# Altium PCB 175-00060, rev2, PCB, NRES RTD_TEC Board.PcbDoc (part 1 of 4)
Units mm, origin at the board's own origin, x right, y up, seen from the top; angles counter-clockwise.
Board outline 188.3 x 85 mm, 8 copper layers (Top Layer (*.GTL), MidLayer1 (*.G1), InternalPlane1 (*.GP1), InternalPlane2 (*.GP2), InternalPlane3 (*.GP3), InternalPlane4 (*.GP4), MidLayer2 (*.G2), Bottom Layer (*.GBL)), stack 1.748 mm thick; 256 components, 199 nets, 1067 pads, 575 vias.
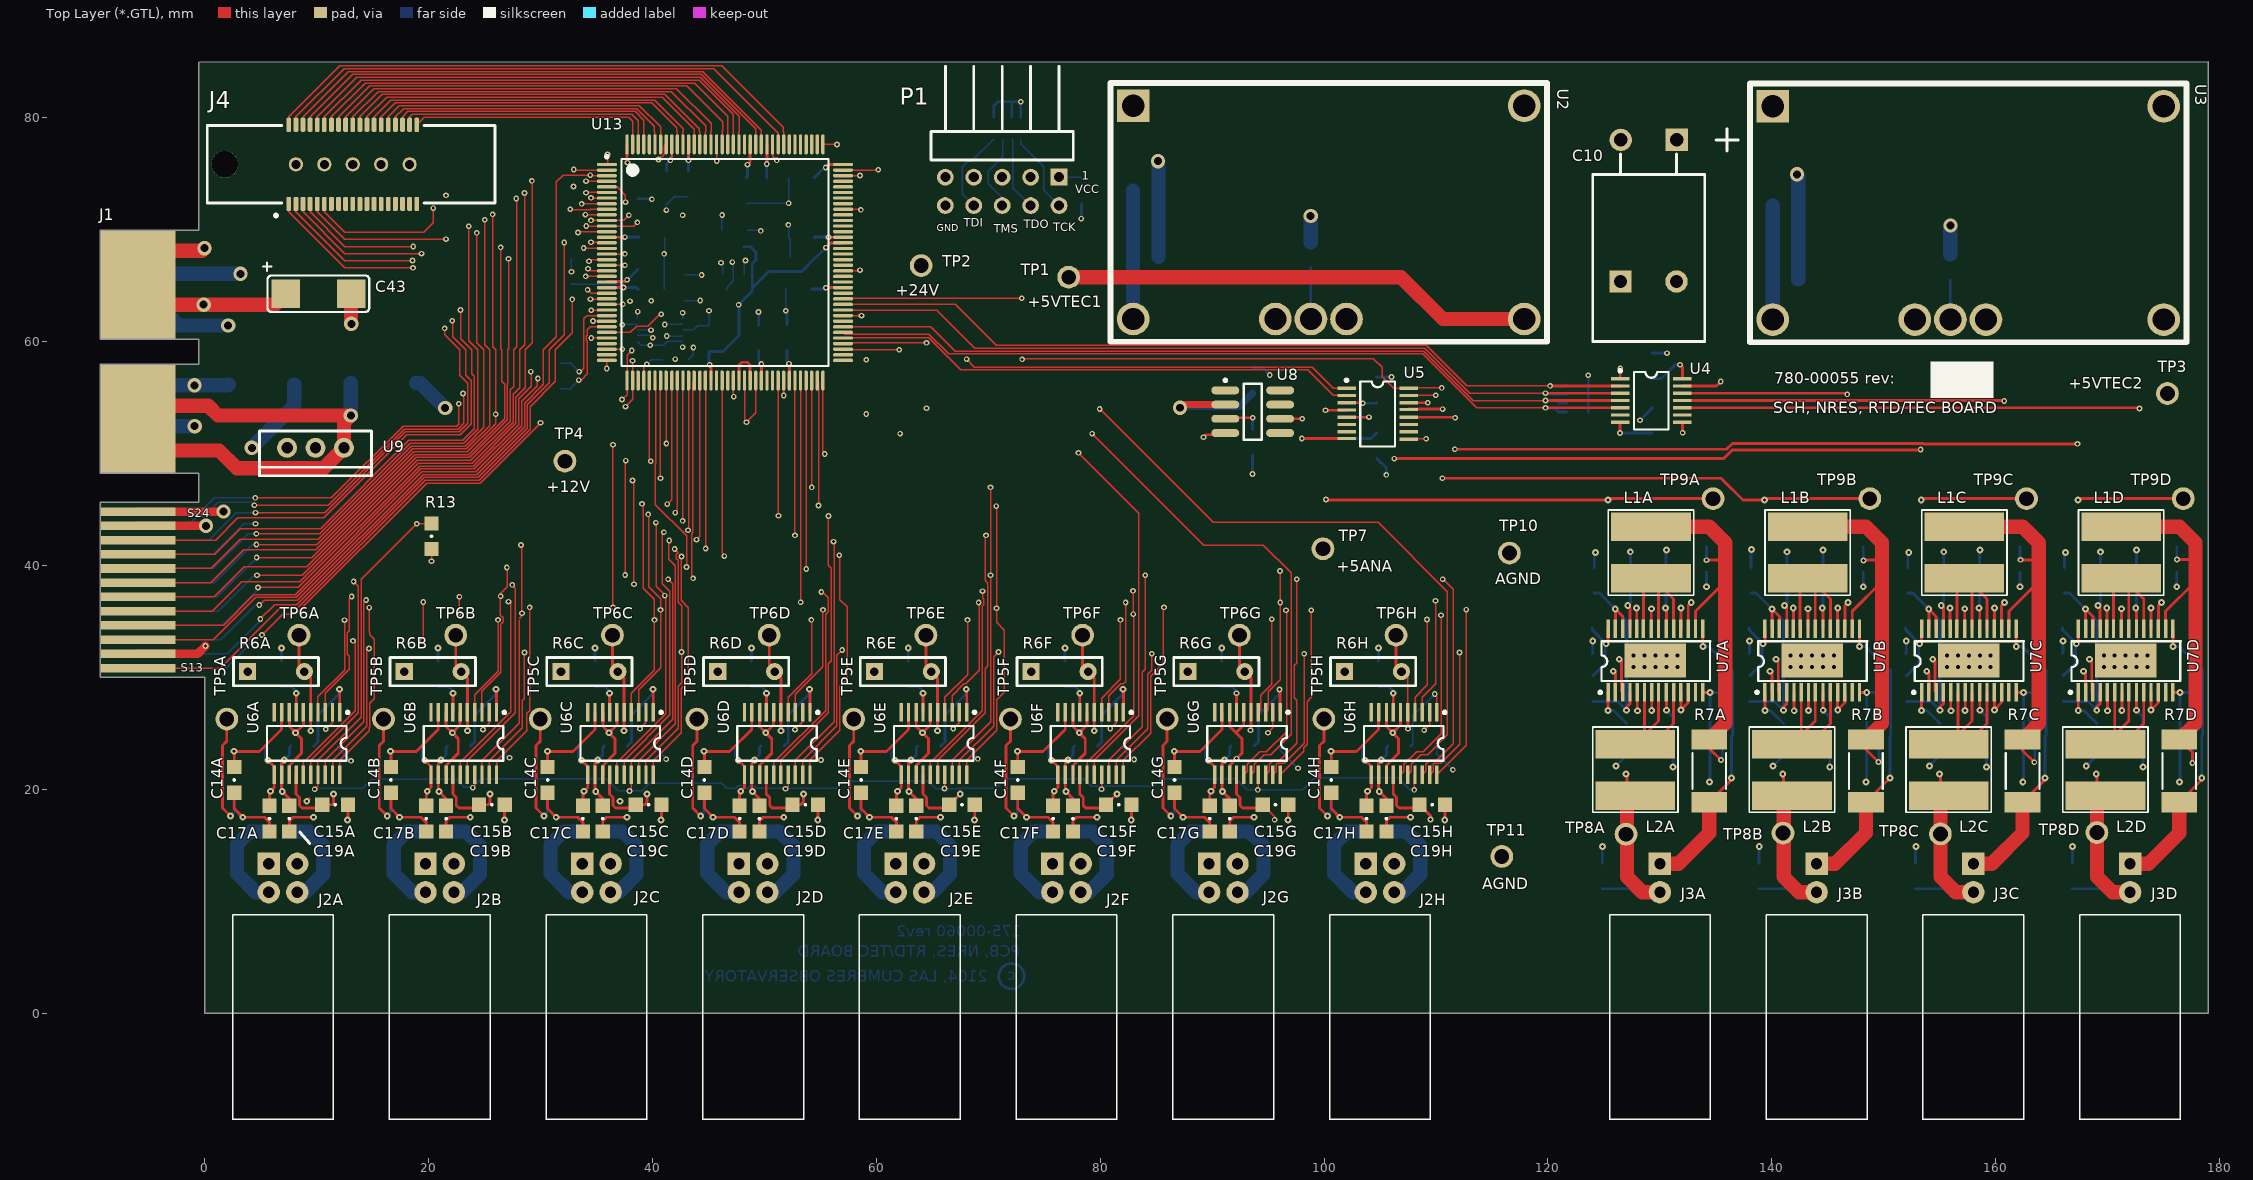
[diagram p0: Top Layer (*.GTL) view]
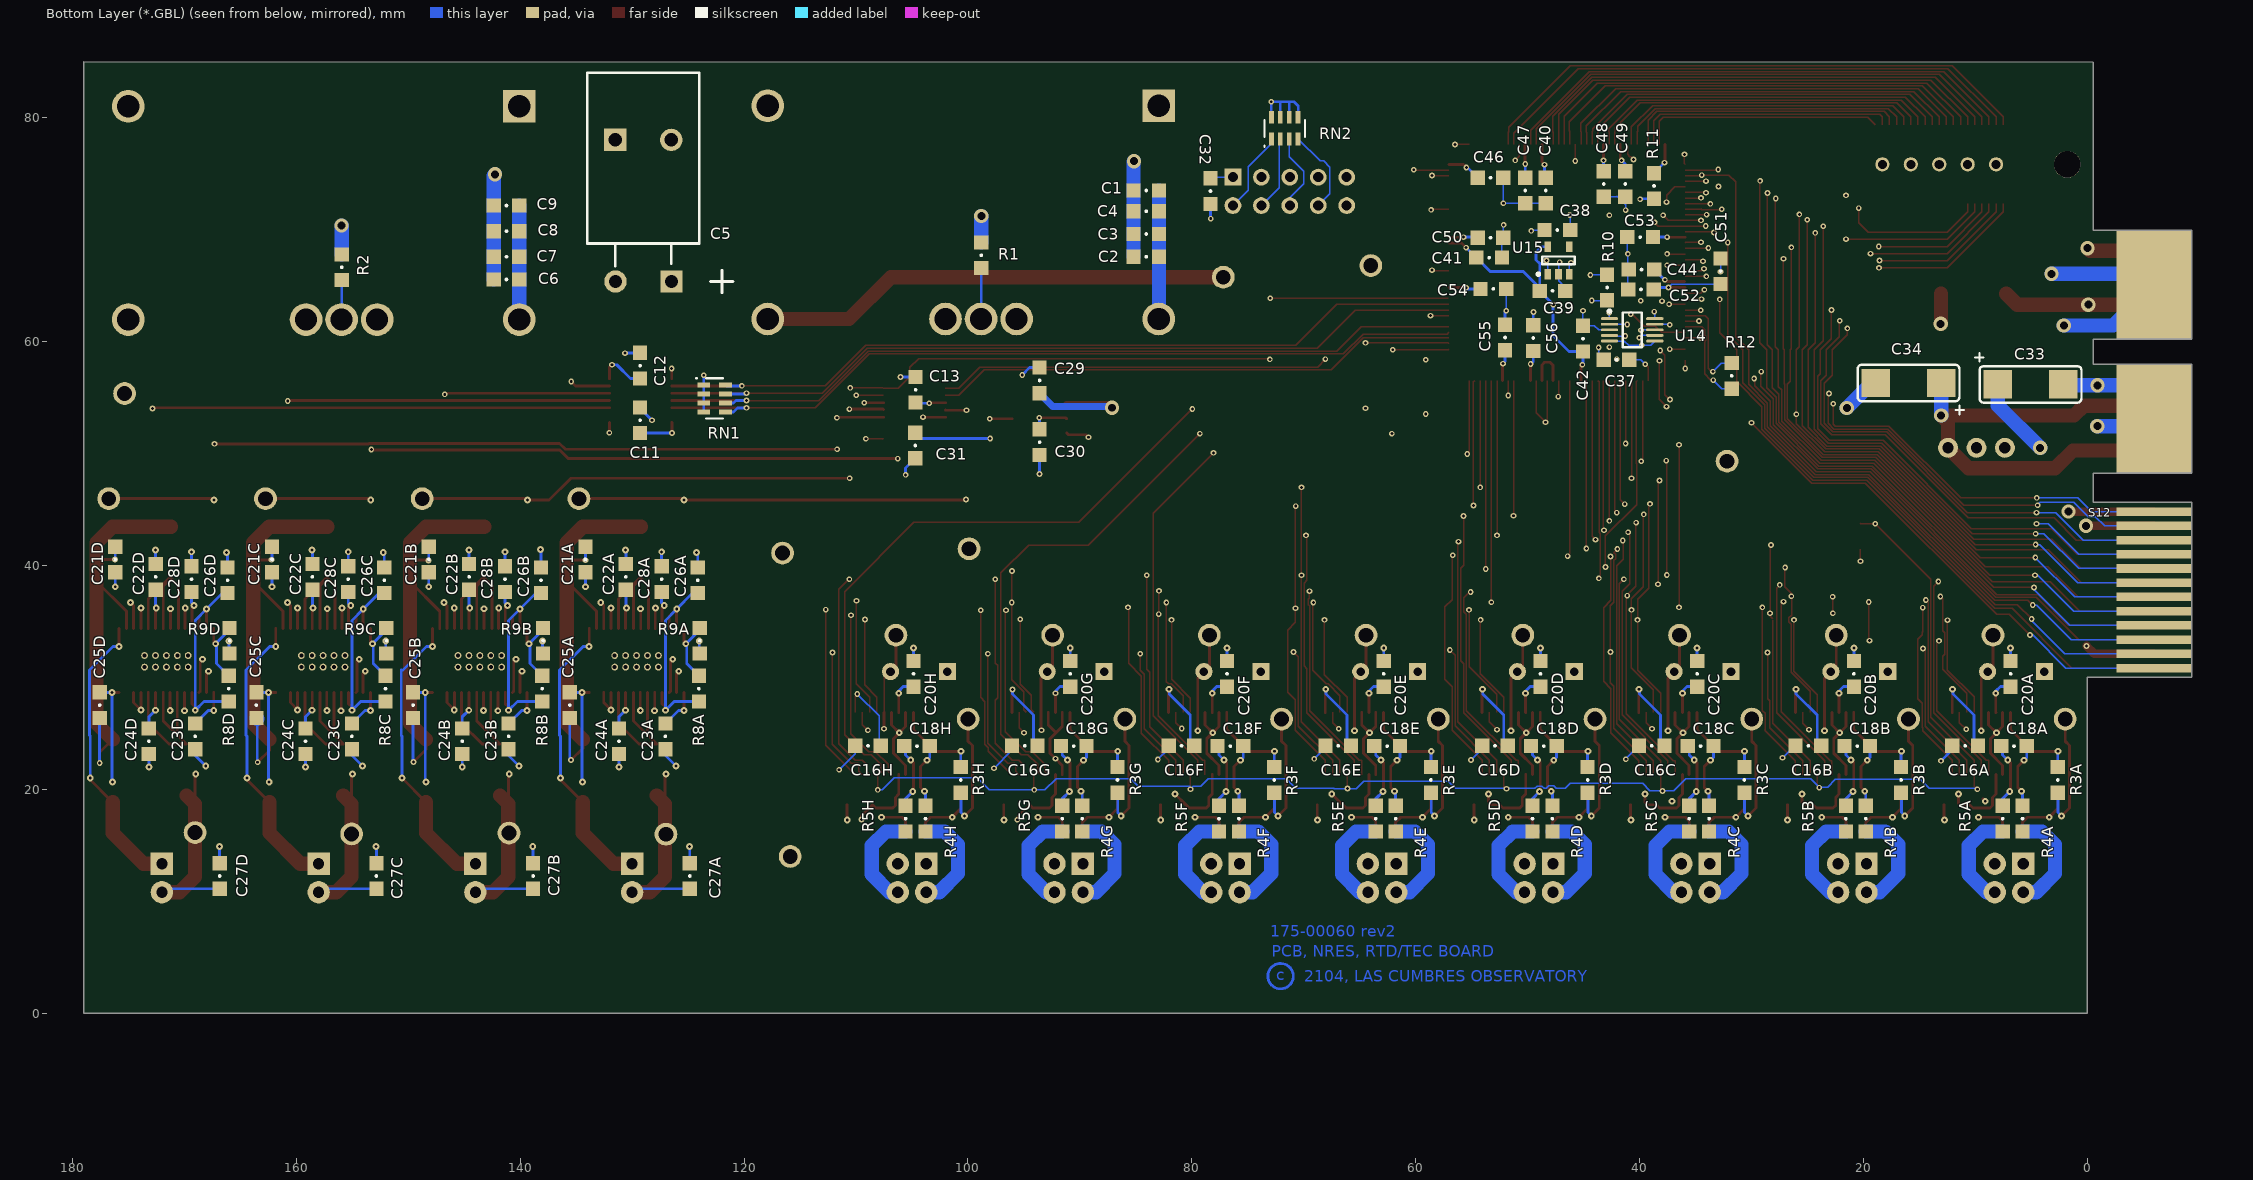
[diagram p1: Bottom Layer (*.GBL) view, seen from below]
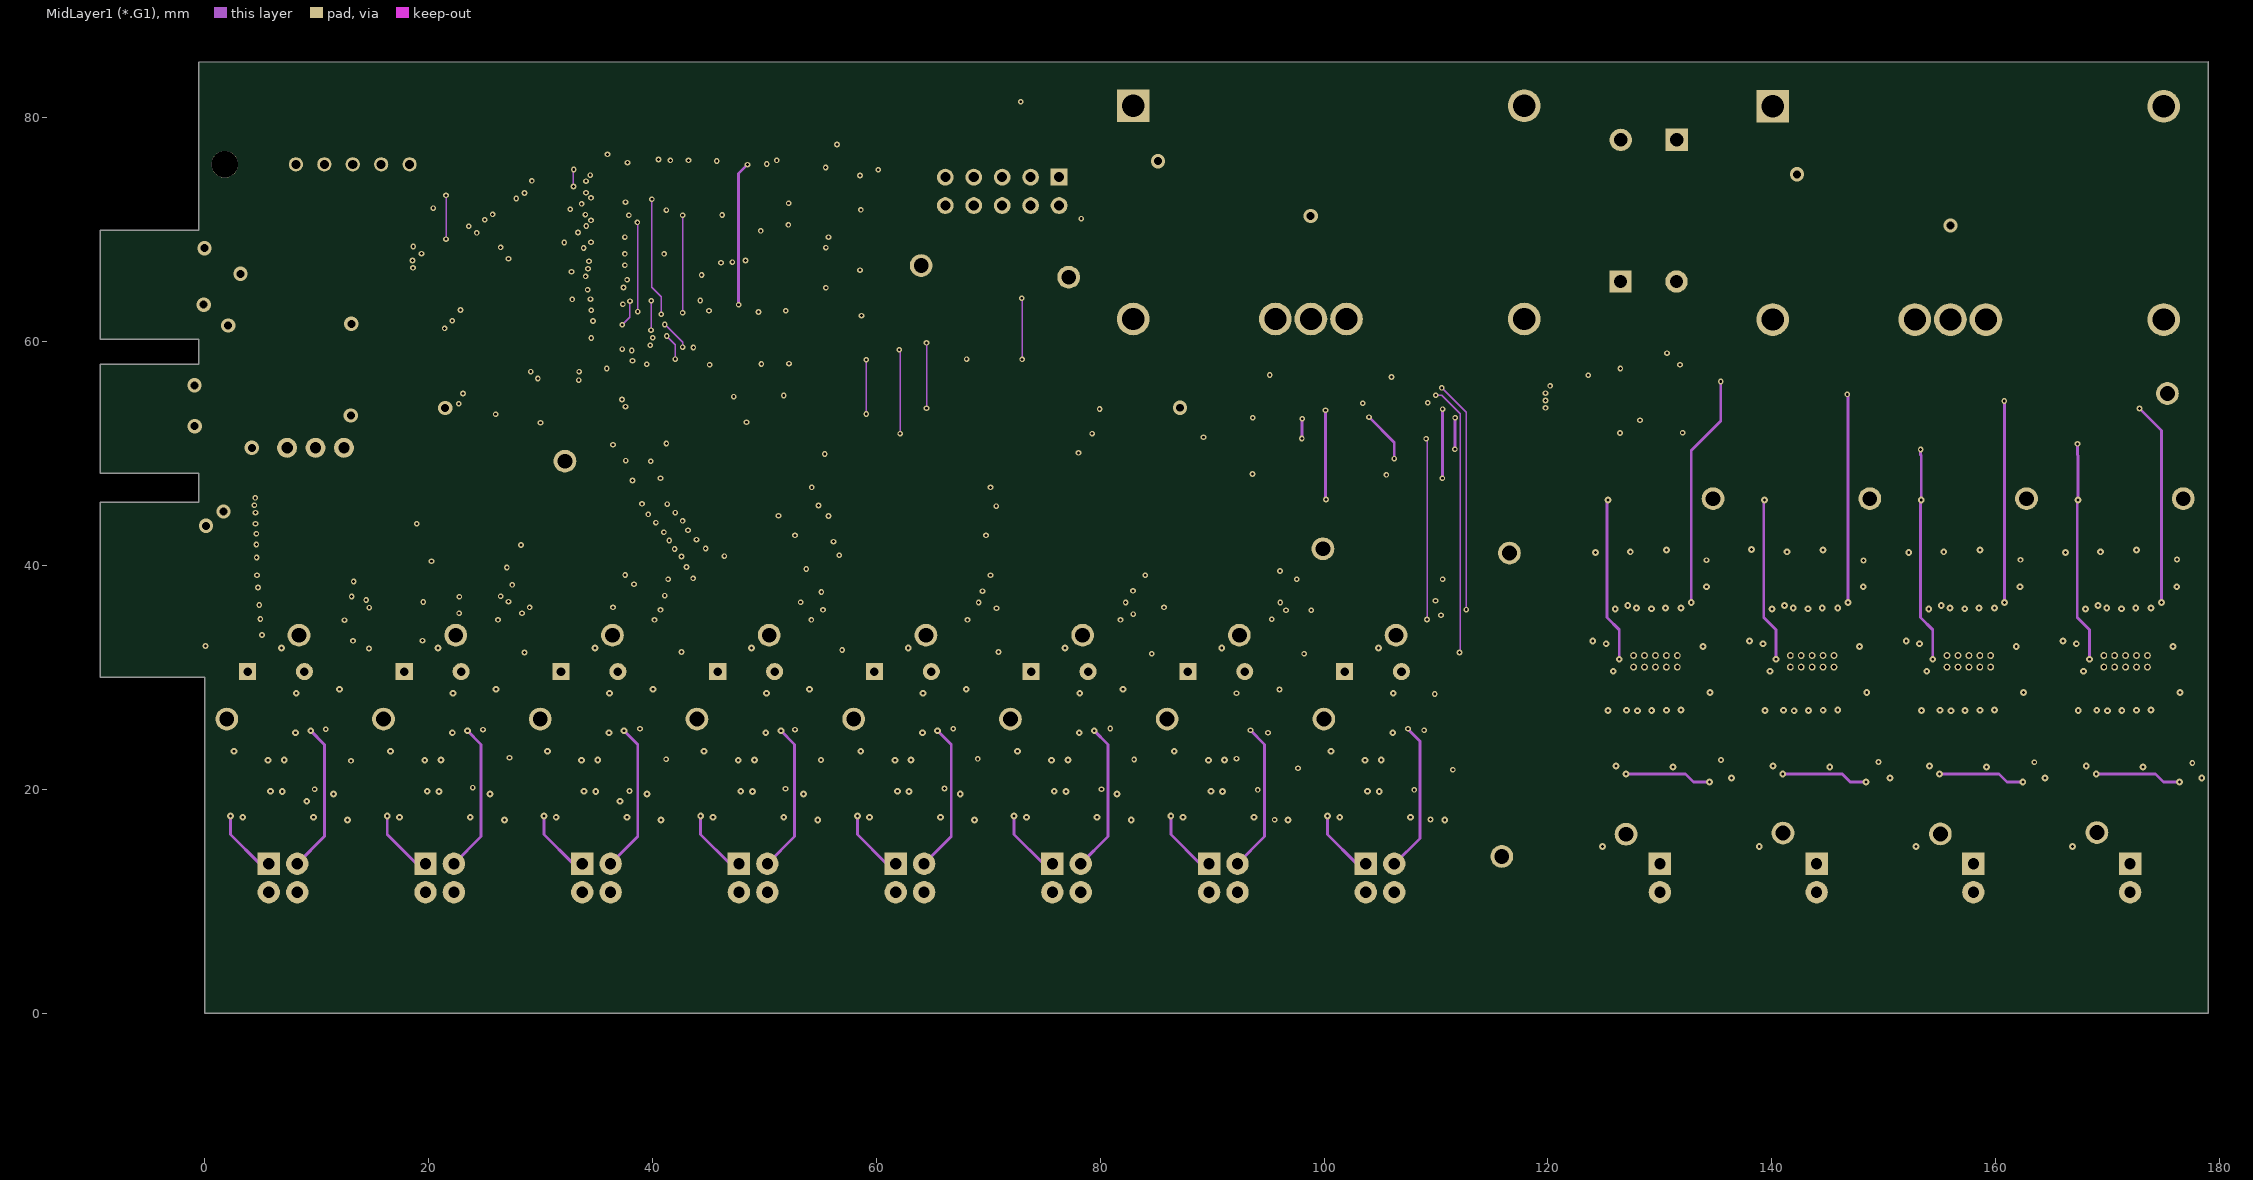
[diagram p2: MidLayer1 (*.G1)]
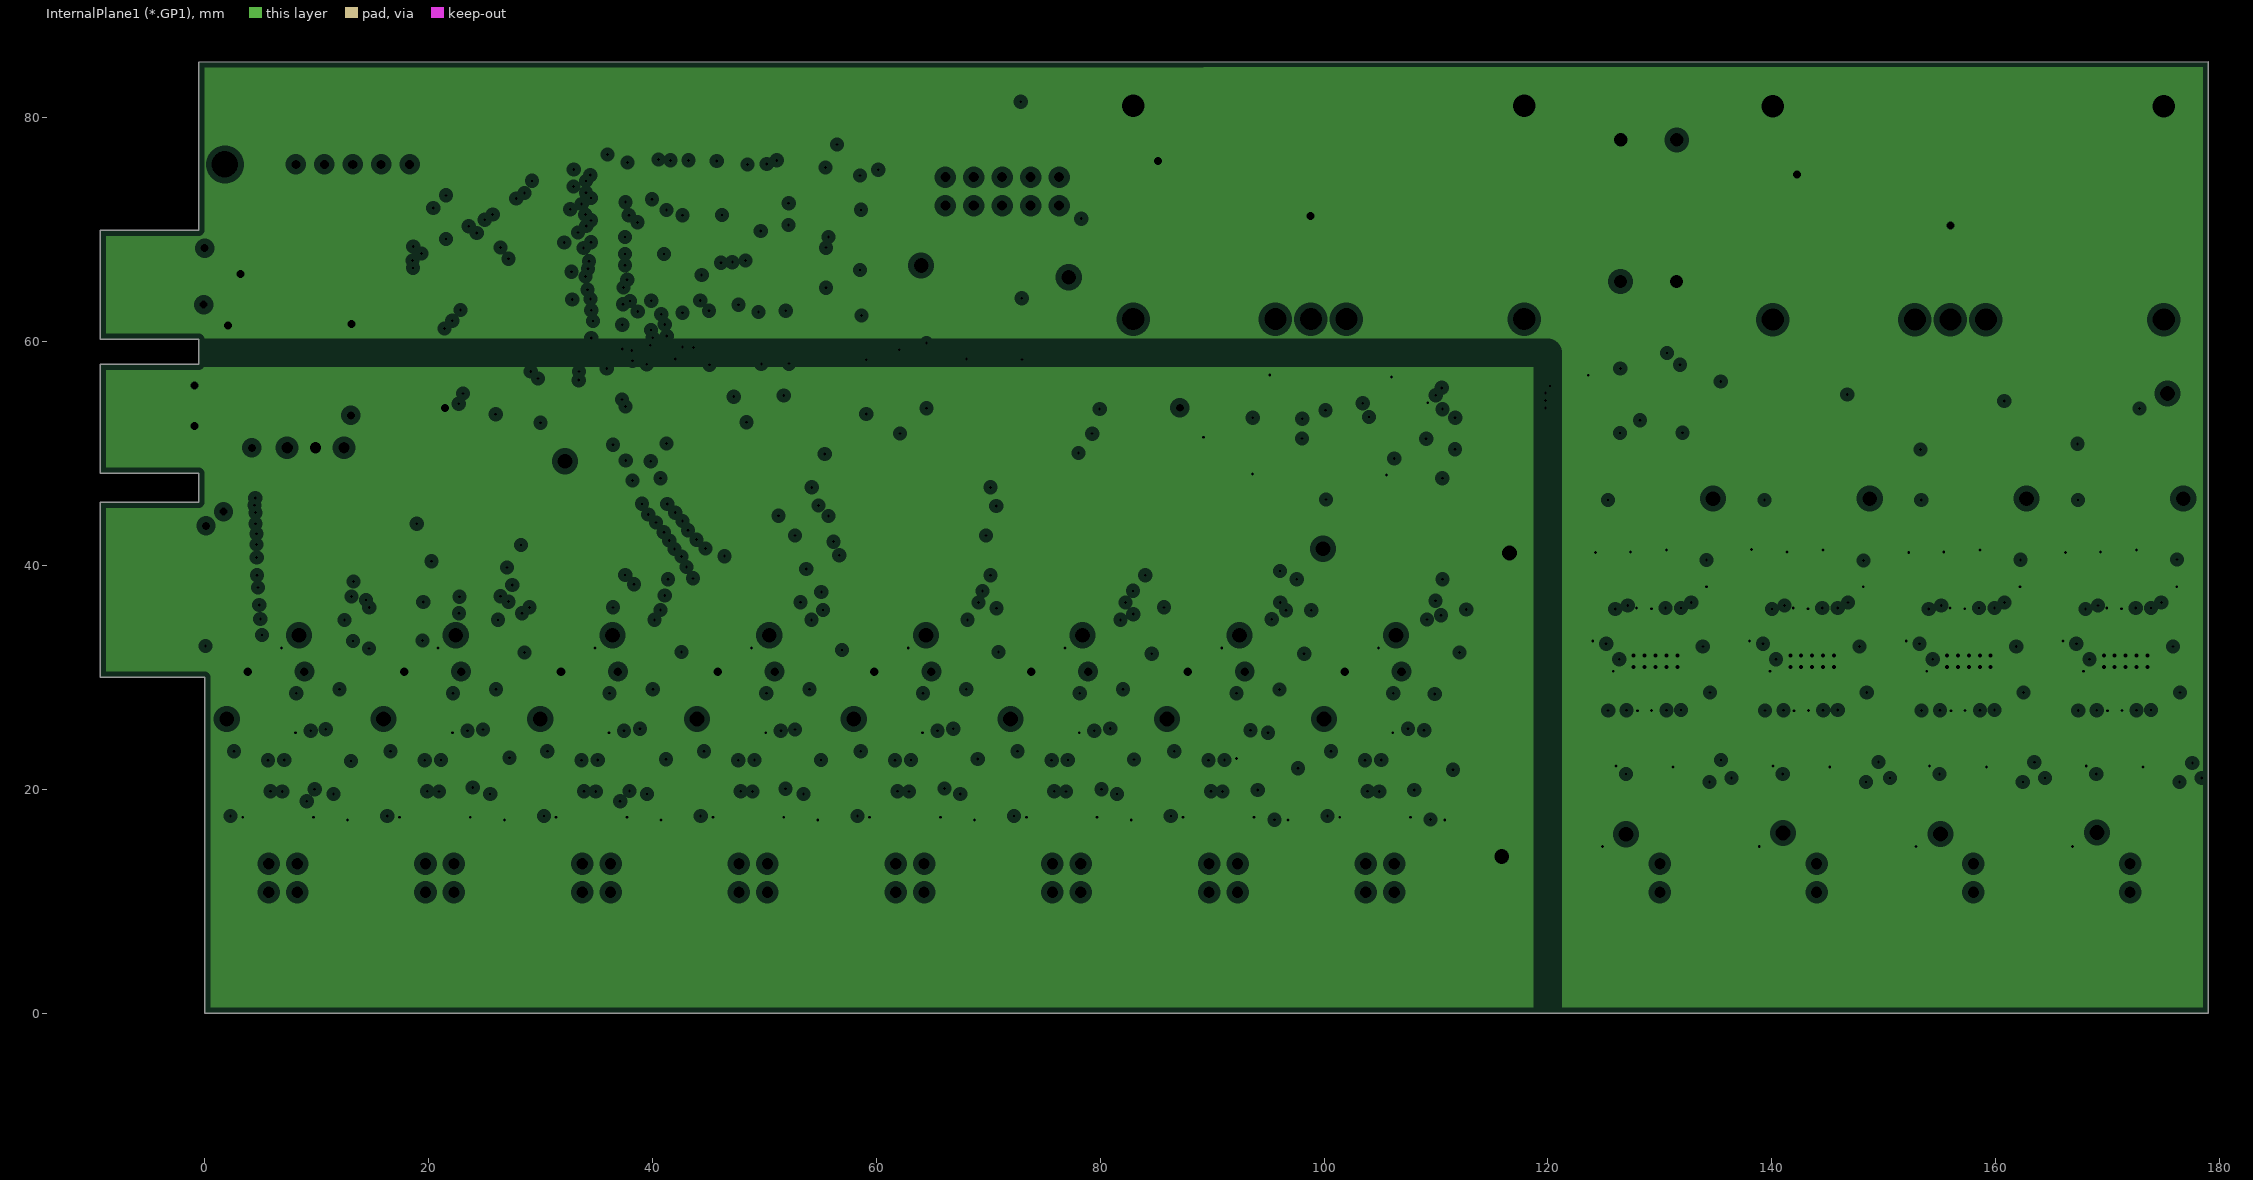
[diagram p3: InternalPlane1 (*.GP1), clearances drawn from the general rule]
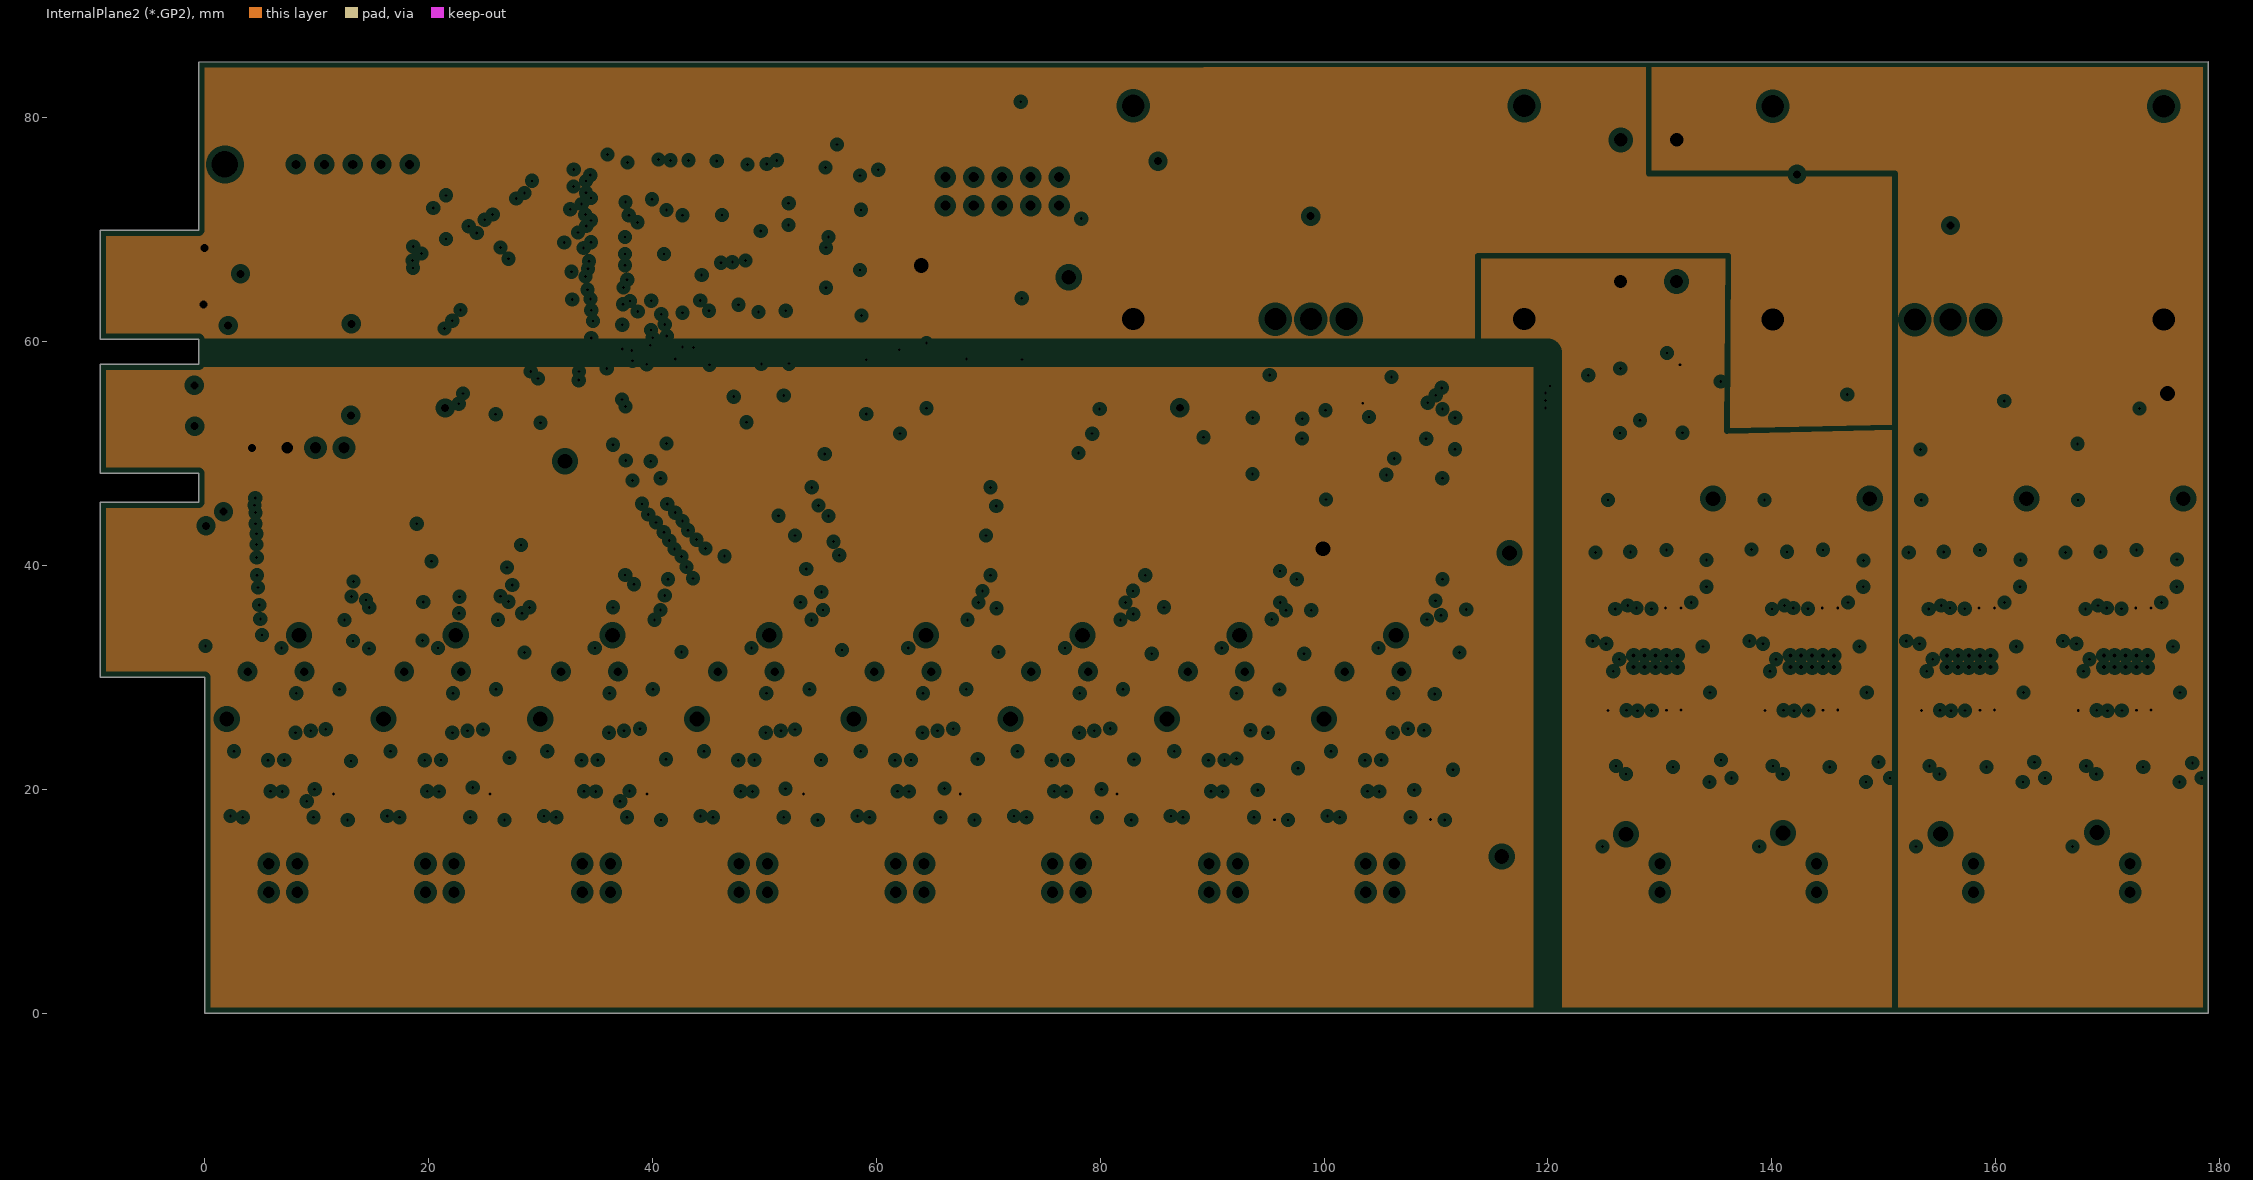
[diagram p4: InternalPlane2 (*.GP2), clearances drawn from the general rule]
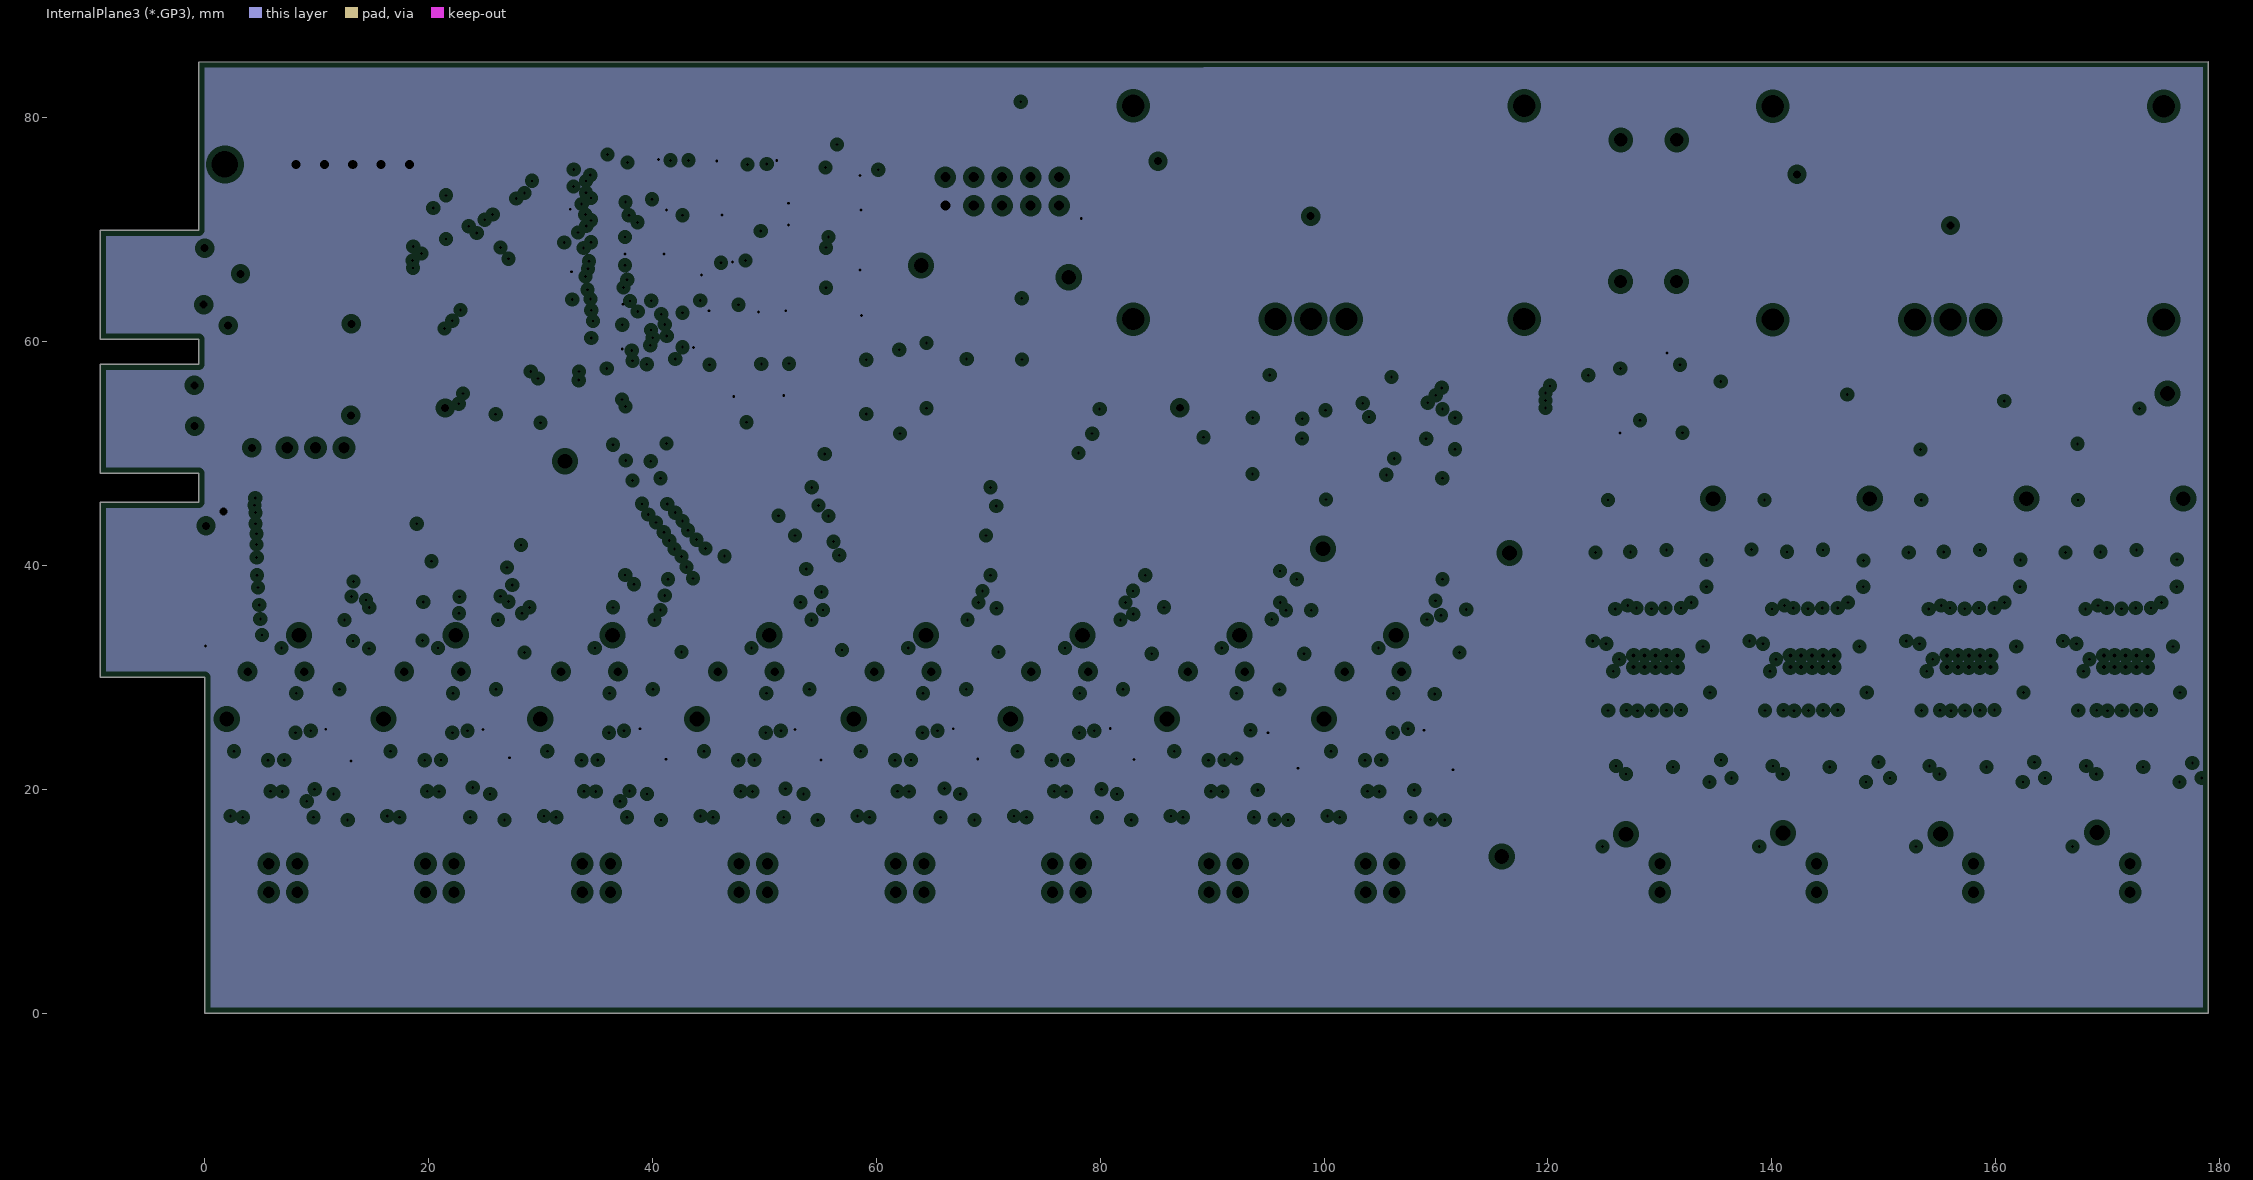
[diagram p5: InternalPlane3 (*.GP3), clearances drawn from the general rule]
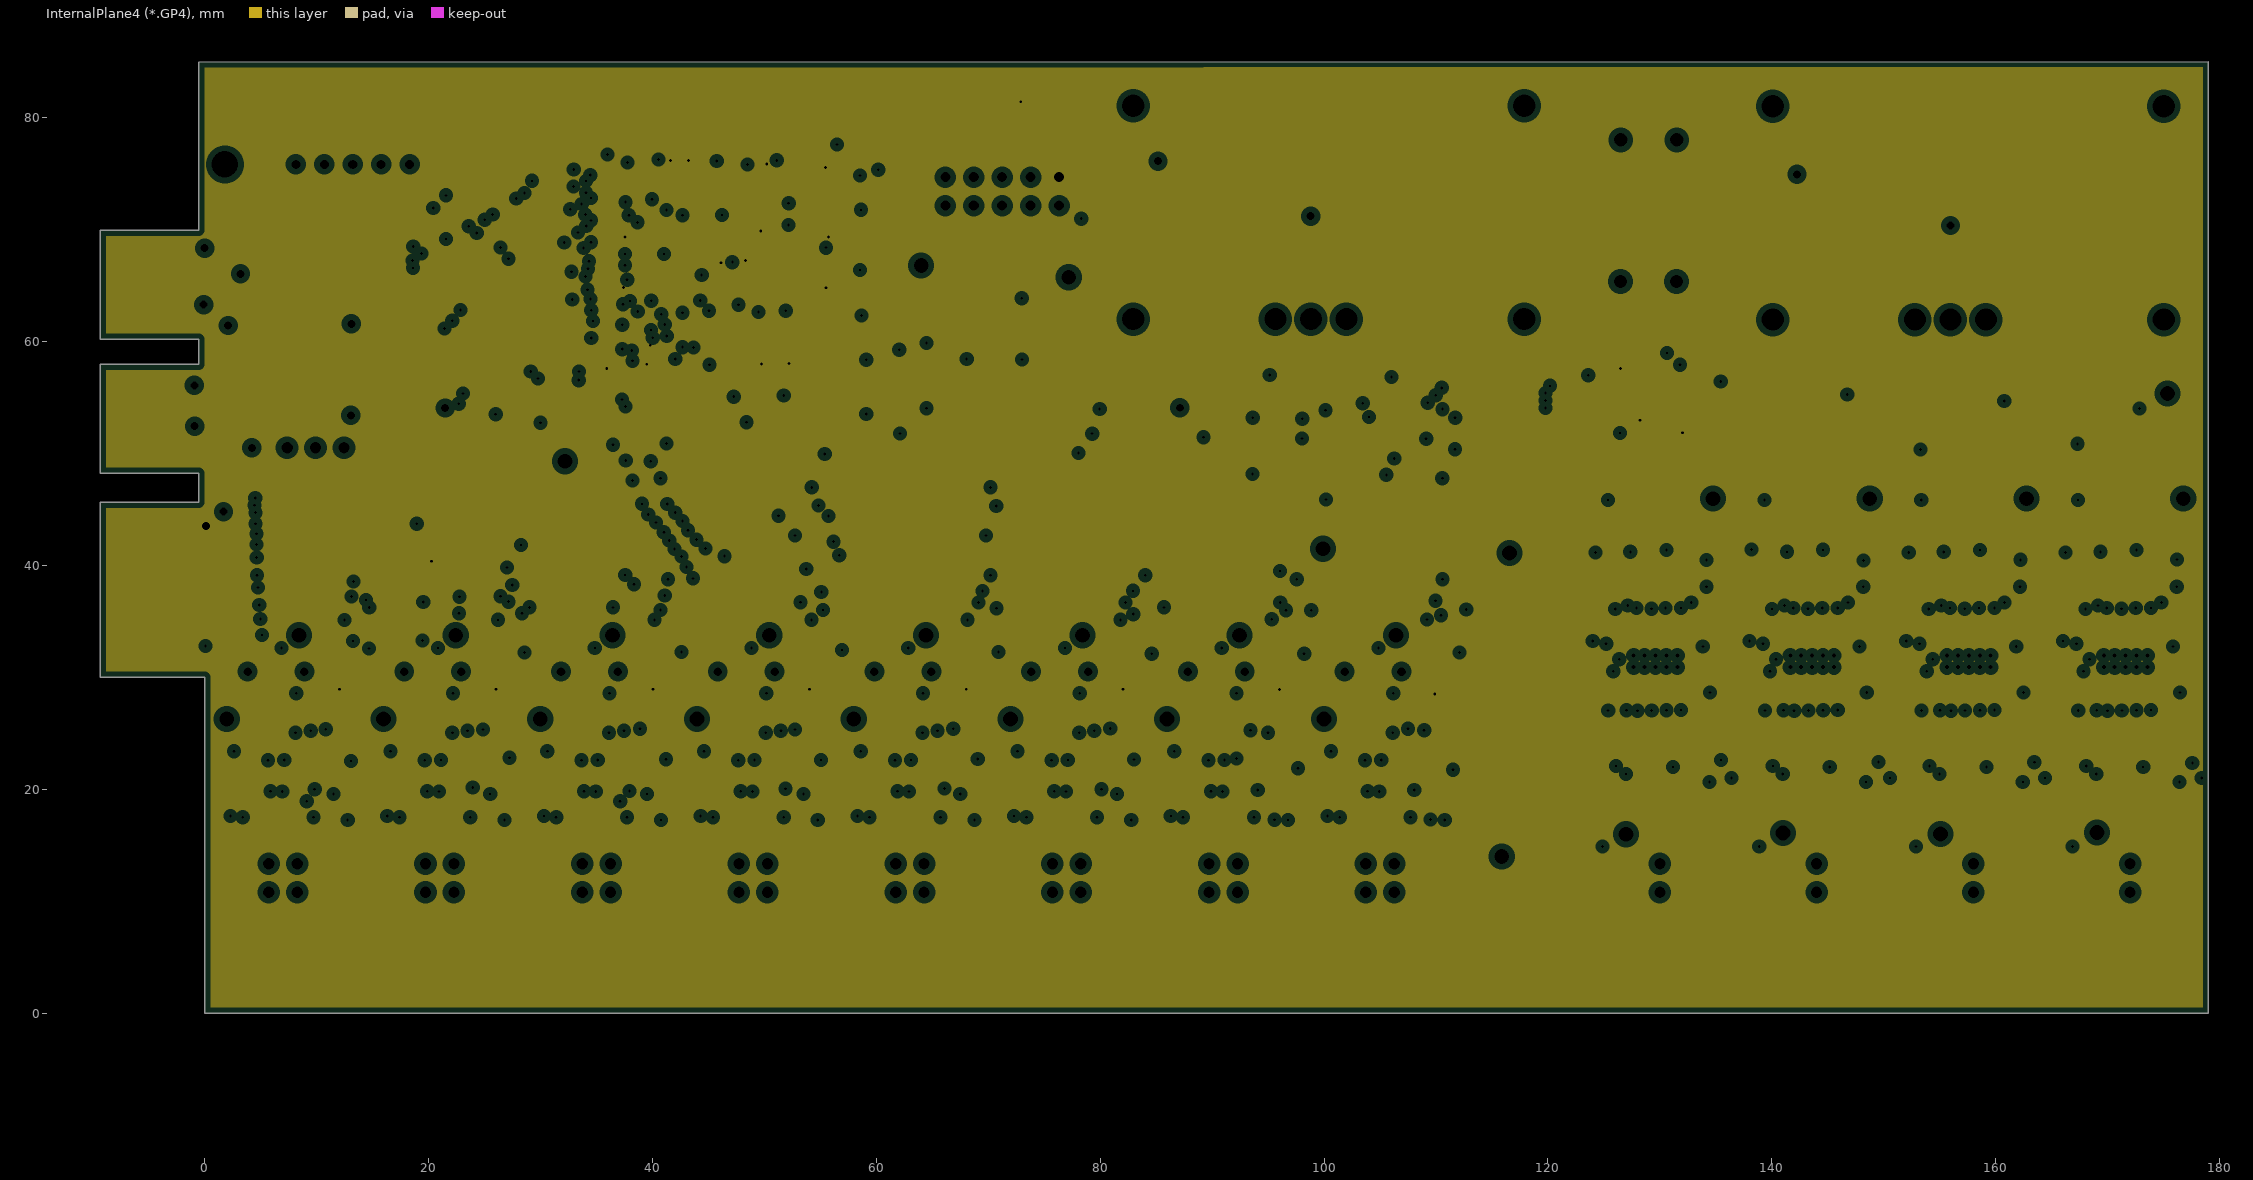
[diagram p6: InternalPlane4 (*.GP4), clearances drawn from the general rule]
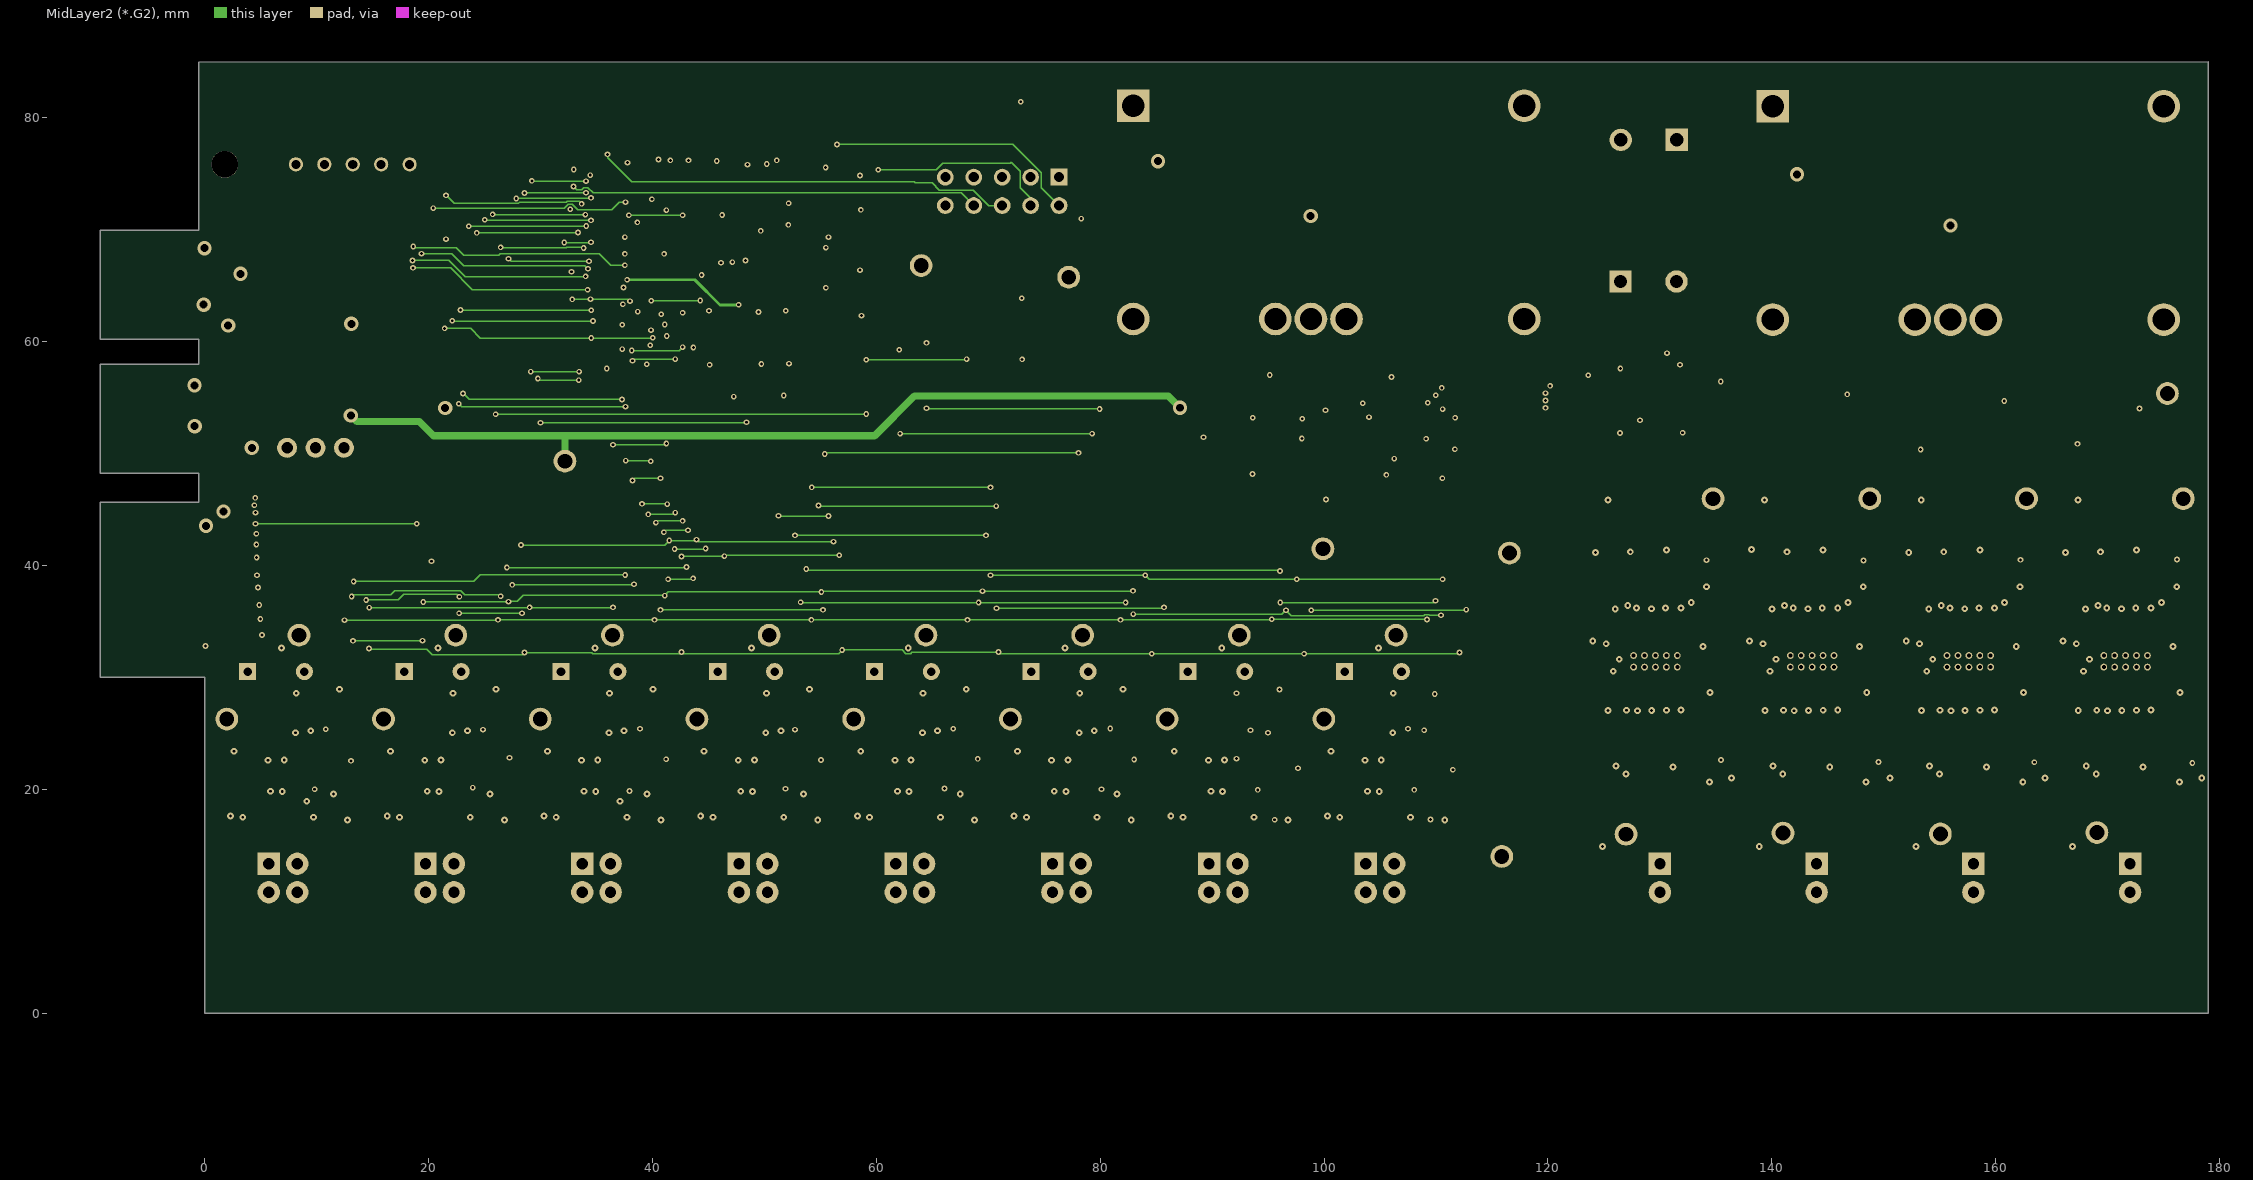
[diagram p7: MidLayer2 (*.G2)]

## Layer stack, top to bottom
Top Solder: solder mask 0.0102, Solder Resist, Dk 3.5
Top Layer (*.GTL): signal copper 0.0356
Dielectric1: core 0.32, FR-4, Dk 4.8
MidLayer1 (*.G1): signal copper 0.0356
Dielectric2: core 0.254, FR-4, Dk 4.2
InternalPlane1 (*.GP1): plane copper 0.0356, net (Multiple Nets)
Dielectric3: prepreg 0.127, FR-4, Dk 4.2
InternalPlane2 (*.GP2): plane copper 0.0356, net (Multiple Nets)
Dielectric4: core 0.254, FR-4, Dk 4.2
InternalPlane3 (*.GP3): plane copper 0.0356, net D
Dielectric5: prepreg 0.127, FR-4, Dk 4.2
InternalPlane4 (*.GP4): plane copper 0.0356, net VCC
Dielectric6: core 0.254, FR-4, Dk 4.2
MidLayer2 (*.G2): signal copper 0.036
Dielectric 7: prepreg 0.127, Dk 4.2
Bottom Layer (*.GBL): signal copper 0.0356
Bottom Solder: solder mask 0.0102, Solder Resist, Dk 3.5

## Board outline
-9.303,30 -9.303,45.621 -0.54,45.621 -0.54,48.212 -9.303,48.212 -9.303,57.94 -0.54,57.94 -0.54,60.201 -9.303,60.201 -9.303,69.929 -0.54,69.929 -0.54,84.929 179,85 179,0 0,0 0,30

## Design rules (kind name [scope] priority, off if disabled: settings)
Clearance [All] p1: gap=0.127
DiffPairsRouting [All] p1: maxlimit=0.254 minlimit=0.127 mostfreqgap=0.127 toplayer_minwidth=0.127 toplayer_maxwidth=0.381 toplayer_prefwidth=0.127 midlayer1_minwidth=0.127 midlayer1_maxwidth=0.381 midlayer1_prefwidth=0.127 midlayer2_minwidth=0.127 midlayer2_maxwidth=0.381 midlayer2_prefwidth=0.127 bottomlayer_minwidth=0.127 bottomlayer_maxwidth=0.381 bottomlayer_prefwidth=0.127 maxuncoupledlength=12.7
MinimumSolderMaskSliver [All] p1: minsoldermaskwidth=0
PlaneClearance [All] p1: clearance=0.508
PlaneConnect PlaneConnect_2 [InNet('VCC')] p1: planeconnectstyle=Direct reliefexpansion=0.508 reliefentries=4 reliefconductorwidth=0.254 reliefairgap=0.254
PlaneConnect PlaneConnect_1 [(HasFootprint('TSSOP28 Exposed Pad'))] p2: planeconnectstyle=Direct reliefexpansion=0.508 reliefentries=4 reliefconductorwidth=0.254 reliefairgap=0.254
PlaneConnect [All] p3: planeconnectstyle=Relief reliefexpansion=0.508 reliefentries=4 reliefconductorwidth=0.254 reliefairgap=0.254
PolygonConnect [All] p1: connectstyle=Relief reliefconductorwidth=0.254 reliefentries=4 polygonreliefangle="90 Angle" airgapwidth=0.254
RoomDefinition "780-00055, rev2, Pg1, SCH, NRES Temp Meas, 8-Chan RTD" [InComponentClass('780-00055, rev2, Pg1, SCH, NRES Temp Meas, 8-Chan RTD ')] p1: confinementstyle=ConfineIn formatcopy=TRUE lockcomponents=FALSE outline -20.574,-11.379 208.001,-11.379 208.001,104.191 -20.574,104.191
RoomDefinition U13_FPGA [InComponentClass('U13_FPGA')] p2: confinementstyle=ConfineIn formatcopy=TRUE lockcomponents=FALSE outline -1.626,40.716 81.382,40.716 81.382,118.212 -1.626,118.212
RoomDefinition TEC_Ch3 [InComponentClass('TEC_Ch3')] p3: confinementstyle=ConfineIn formatcopy=TRUE lockcomponents=FALSE outline 163.313,-11.552 179.874,-11.552 179.874,51.034 163.313,51.034
RoomDefinition TEC_Ch2 [InComponentClass('TEC_Ch2')] p4: confinementstyle=ConfineIn formatcopy=TRUE lockcomponents=FALSE outline 149.313,-11.552 165.874,-11.552 165.874,51.034 149.313,51.034
RoomDefinition TEC_Ch1 [InComponentClass('TEC_Ch1')] p5: confinementstyle=ConfineIn formatcopy=FALSE lockcomponents=FALSE outline 135.313,-11.552 151.874,-11.552 151.874,51.034 135.313,51.034
RoomDefinition TEC_Ch0 [InComponentClass('TEC_Ch0')] p6: confinementstyle=ConfineIn formatcopy=FALSE lockcomponents=FALSE outline 121.313,-11.552 137.874,-11.552 137.874,51.034 121.313,51.034
RoomDefinition "Power Supplies" [InComponentClass('Power Supplies')] p7: confinementstyle=ConfineIn formatcopy=TRUE lockcomponents=FALSE outline -18.339,-61.722 216.281,-61.722 216.281,148.565 -18.339,148.565
RoomDefinition ADC_Ch7 [InComponentClass('ADC_Ch7')] p8: confinementstyle=ConfineIn formatcopy=TRUE lockcomponents=FALSE outline 97.507,-10.79 112.239,-10.79 112.239,36.708 97.507,36.708
RoomDefinition ADC_Ch6 [InComponentClass('ADC_Ch6')] p9: confinementstyle=ConfineIn formatcopy=TRUE lockcomponents=FALSE outline 83.507,-10.79 98.239,-10.79 98.239,36.708 83.507,36.708
RoomDefinition ADC_Ch5 [InComponentClass('ADC_Ch5')] p10: confinementstyle=ConfineIn formatcopy=TRUE lockcomponents=FALSE outline 69.507,-10.79 84.239,-10.79 84.239,36.708 69.507,36.708
RoomDefinition ADC_Ch4 [InComponentClass('ADC_Ch4')] p11: confinementstyle=ConfineIn formatcopy=TRUE lockcomponents=FALSE outline 55.507,-10.79 70.239,-10.79 70.239,36.708 55.507,36.708
RoomDefinition ADC_Ch3 [InComponentClass('ADC_Ch3')] p12: confinementstyle=ConfineIn formatcopy=TRUE lockcomponents=FALSE outline 41.507,-10.79 56.239,-10.79 56.239,36.708 41.507,36.708
RoomDefinition ADC_Ch2 [InComponentClass('ADC_Ch2')] p13: confinementstyle=ConfineIn formatcopy=TRUE lockcomponents=FALSE outline 27.507,-10.79 42.239,-10.79 42.239,36.708 27.507,36.708
RoomDefinition ADC_Ch1 [InComponentClass('ADC_Ch1')] p14: confinementstyle=ConfineIn formatcopy=FALSE lockcomponents=FALSE outline 13.507,-10.79 28.239,-10.79 28.239,36.708 13.507,36.708
RoomDefinition ADC_Ch0 [InComponentClass('ADC_Ch0')] p15: confinementstyle=ConfineIn formatcopy=TRUE lockcomponents=FALSE outline -0.493,-10.79 14.239,-10.79 14.239,36.708 -0.493,36.708
RoutingVias [All] p1: holewidth=0.254 width=0.508 viastyle="Through Hole" minholewidth=0.254 minwidth=0.508 maxholewidth=1.27 maxwidth=1.27
SilkToSilkClearance [All] p1: silktosilkclearance=0.025
SilkToSolderMaskClearance SilkscreenOverComponentPads [IsPad] p1: minsilkscreentomaskgap=0.025 clearancetoexposedcopper=TRUE
SolderMaskExpansion [All] p1: expansion=0.102
Width [All] p1: maxlimit=2.54 minlimit=0.127 preferedwidth=0.127
23 further rules are at their usual default settings.

## Classes and differential pairs
channel class "780-00055, rev2, Pg3, SCH, NRES Temp Meas, 8-Chan RTD": TEC_Ch0 TEC_Ch1 TEC_Ch2 TEC_Ch3
channel class "780-00055, rev2, Pg2, SCH, NRES Temp Meas, 8-Chan RTD": ADC_Ch0 ADC_Ch1 ADC_Ch2 ADC_Ch3 ADC_Ch4 ADC_Ch5 ADC_Ch6 ADC_Ch7
component class "780-00055, rev2, Pg1, SCH, NRES Temp Meas, 8-Chan RTD": C11 C12 C13 C29 C30 C31 C32 C37 J1 P1 R10 R13 RN1 RN2 U4 U5 U8 U14
component class ADC_Ch0: C14A C15A C16A C17A C18A C19A C20A J2A R3A R4A R5A R6A TP5A TP6A U6A
component class ADC_Ch1: C14B C15B C16B C17B C18B C19B C20B J2B R3B R4B R5B R6B TP5B TP6B U6B
component class ADC_Ch2: C14C C15C C16C C17C C18C C19C C20C J2C R3C R4C R5C R6C TP5C TP6C U6C
component class ADC_Ch3: C14D C15D C16D C17D C18D C19D C20D J2D R3D R4D R5D R6D TP5D TP6D U6D
component class ADC_Ch4: C14E C15E C16E C17E C18E C19E C20E J2E R3E R4E R5E R6E TP5E TP6E U6E
component class ADC_Ch5: C14F C15F C16F C17F C18F C19F C20F J2F R3F R4F R5F R6F TP5F TP6F U6F
component class ADC_Ch6: C14G C15G C16G C17G C18G C19G C20G J2G R3G R4G R5G R6G TP5G TP6G U6G
component class ADC_Ch7: C14H C15H C16H C17H C18H C19H C20H J2H R3H R4H R5H R6H TP5H TP6H U6H
component class "Power Supplies": C1 C2 C3 C4 C5 C6 C7 C8 C9 C10 C33 C34 C43 R1 R2 TP1 TP2 TP3 TP4 TP7 TP10 TP11 U2 U3 U9
component class TEC_Ch0: C21A C22A C23A C24A C25A C26A C27A C28A J3A L1A L2A R7A R8A R9A TP8A TP9A U7A
component class TEC_Ch1: C21B C22B C23B C24B C25B C26B C27B C28B J3B L1B L2B R7B R8B R9B TP8B TP9B U7B
component class TEC_Ch2: C21C C22C C23C C24C C25C C26C C27C C28C J3C L1C L2C R7C R8C R9C TP8C TP9C U7C
component class TEC_Ch3: C21D C22D C23D C24D C25D C26D C27D C28D J3D L1D L2D R7D R8D R9D TP8D TP9D U7D
component class U13_FPGA: C38 C39 C40 C41 C42 C44 C46 C47 C48 C49 C50 C51 C52 C53 C54 C55 C56 J4 R11 R12 U13 U15
differential pair SPARE_LVDS: +SPARE_LVDS_P -SPARE_LVDS_N

## Components (designator, comment, footprint, x,y, rotation, side; value= is the part's Value field where it differs from the comment)
C1 "35V CER" SMD_0805 84.074,73.482 r180 bottom
C2 "35V CER" SMD_0805 84.074,67.564 r180 bottom
C3 "35V CER" SMD_0805 84.074,69.596 r180 bottom
C4 "35V CER" SMD_0805 84.074,71.628 r180 bottom
C5 "35V" "CAP, Thru Hole 10mm dia" 128.981,65.354 r180 bottom
C6 "35V CER" SMD_0805 141.224,65.532 r180 bottom
C7 "35V CER" SMD_0805 141.224,67.564 r180 bottom
C8 "35V CER" SMD_0805 141.224,69.85 r180 bottom
C9 "35V CER" SMD_0805 141.224,72.136 r180 bottom
C10 "35V" "CAP, Thru Hole 10mm dia" 129,78 r0 top
C11 "Cap SMD" SMD_0805 129.286,52.959 r270 bottom
C12 "Cap SMD" SMD_0805 129.286,57.836 r90 bottom
C13 "1u" SMD_0805 104.673,55.677 r270 bottom
C14A "16V" SMD_0805 2.642,20.828 r90 top (schematic designator C14)
C14B "16V" SMD_0805 16.642,20.828 r90 top (schematic designator C14)
C14C "16V" SMD_0805 30.642,20.828 r90 top (schematic designator C14)
C14D "16V" SMD_0805 44.642,20.828 r90 top (schematic designator C14)
C14E "16V" SMD_0805 58.642,20.828 r90 top (schematic designator C14)
C14F "16V" SMD_0805 72.642,20.828 r90 top (schematic designator C14)
C14G "16V" SMD_0805 86.642,20.828 r90 top (schematic designator C14)
C14H "16V" SMD_0805 100.642,20.828 r90 top (schematic designator C14)
C15A "16V" SMD_0805 11.659,18.618 r180 top (schematic designator C15)
C15B "16V" SMD_0805 25.659,18.618 r180 top (schematic designator C15)
C15C "16V" SMD_0805 39.659,18.618 r180 top (schematic designator C15)
C15D "16V" SMD_0805 53.659,18.618 r180 top (schematic designator C15)
C15E "16V" SMD_0805 67.659,18.618 r180 top (schematic designator C15)
C15F "16V" SMD_0805 81.659,18.618 r180 top (schematic designator C15)
C15G "16V" SMD_0805 95.659,18.618 r180 top (schematic designator C15)
C15H "16V" SMD_0805 109.659,18.618 r180 top (schematic designator C15)
C16A "16V" SMD_0805 10.922,23.876 r180 bottom (schematic designator C16)
C16B "16V" SMD_0805 24.922,23.876 r180 bottom (schematic designator C16)
C16C "16V" SMD_0805 38.922,23.876 r180 bottom (schematic designator C16)
C16D "16V" SMD_0805 52.922,23.876 r180 bottom (schematic designator C16)
C16E "16V" SMD_0805 66.922,23.876 r180 bottom (schematic designator C16)
C16F "16V" SMD_0805 80.922,23.876 r180 bottom (schematic designator C16)
C16G "16V" SMD_0805 94.922,23.876 r180 bottom (schematic designator C16)
C16H "16V" SMD_0805 108.922,23.876 r180 bottom (schematic designator C16)
C17A "Cap SMD" SMD_0805 5.791,17.374 r90 top (schematic designator C17)
C17B "Cap SMD" SMD_0805 19.791,17.374 r90 top (schematic designator C17)
C17C "Cap SMD" SMD_0805 33.791,17.374 r90 top (schematic designator C17)
C17D "Cap SMD" SMD_0805 47.791,17.374 r90 top (schematic designator C17)
C17E "Cap SMD" SMD_0805 61.791,17.374 r90 top (schematic designator C17)
C17F "Cap SMD" SMD_0805 75.791,17.374 r90 top (schematic designator C17)
C17G "Cap SMD" SMD_0805 89.791,17.374 r90 top (schematic designator C17)
C17H "Cap SMD" SMD_0805 103.791,17.374 r90 top (schematic designator C17)
C18A "Cap SMD" SMD_0805 6.553,23.851 r180 bottom (schematic designator C18)
C18B "Cap SMD" SMD_0805 20.553,23.851 r180 bottom (schematic designator C18)
C18C "Cap SMD" SMD_0805 34.553,23.851 r180 bottom (schematic designator C18)
C18D "Cap SMD" SMD_0805 48.553,23.851 r180 bottom (schematic designator C18)
C18E "Cap SMD" SMD_0805 62.553,23.851 r180 bottom (schematic designator C18)
C18F "Cap SMD" SMD_0805 76.553,23.851 r180 bottom (schematic designator C18)
C18G "Cap SMD" SMD_0805 90.553,23.851 r180 bottom (schematic designator C18)
C18H "Cap SMD" SMD_0805 104.553,23.851 r180 bottom (schematic designator C18)
C19A "Cap SMD" SMD_0805 7.569,17.374 r90 top (schematic designator C19)
C19B "Cap SMD" SMD_0805 21.569,17.374 r90 top (schematic designator C19)
C19C "Cap SMD" SMD_0805 35.569,17.374 r90 top (schematic designator C19)
C19D "Cap SMD" SMD_0805 49.569,17.374 r90 top (schematic designator C19)
C19E "Cap SMD" SMD_0805 63.569,17.374 r90 top (schematic designator C19)
C19F "Cap SMD" SMD_0805 77.569,17.374 r90 top (schematic designator C19)
C19G "Cap SMD" SMD_0805 91.569,17.374 r90 top (schematic designator C19)
C19H "Cap SMD" SMD_0805 105.569,17.374 r90 top (schematic designator C19)
C20A "16V" SMD_0805 6.858,30.302 r270 bottom (schematic designator C20)
C20B "16V" SMD_0805 20.858,30.302 r270 bottom (schematic designator C20)
C20C "16V" SMD_0805 34.858,30.302 r270 bottom (schematic designator C20)
C20D "16V" SMD_0805 48.858,30.302 r270 bottom (schematic designator C20)
C20E "16V" SMD_0805 62.858,30.302 r270 bottom (schematic designator C20)
C20F "16V" SMD_0805 76.858,30.302 r270 bottom (schematic designator C20)
C20G "16V" SMD_0805 90.858,30.302 r270 bottom (schematic designator C20)
C20H "16V" SMD_0805 104.858,30.302 r270 bottom (schematic designator C20)
C21A "Cap SMD" SMD_0805 134.166,40.518 r270 bottom (schematic designator C21)
C21B "Cap SMD" SMD_0805 148.165,40.518 r270 bottom (schematic designator C21)
C21C "Cap SMD" SMD_0805 162.166,40.518 r270 bottom (schematic designator C21)
C21D "Cap SMD" SMD_0805 176.166,40.518 r270 bottom (schematic designator C21)
C22A "Cap SMD" SMD_0805 130.559,38.969 r270 bottom (schematic designator C22)
C22B "Cap SMD" SMD_0805 144.559,38.969 r270 bottom (schematic designator C22)
C22C "Cap SMD" SMD_0805 158.559,38.969 r270 bottom (schematic designator C22)
C22D "Cap SMD" SMD_0805 172.559,38.969 r270 bottom (schematic designator C22)
C23A "Cap SMD" SMD_0805 127.028,24.719 r90 bottom (schematic designator C23)
C23B "Cap SMD" SMD_0805 141.028,24.719 r90 bottom (schematic designator C23)
C23C "Cap SMD" SMD_0805 155.028,24.719 r90 bottom (schematic designator C23)
C23D "Cap SMD" SMD_0805 169.028,24.719 r90 bottom (schematic designator C23)
C24A "Cap SMD" SMD_0805 131.168,24.287 r90 bottom (schematic designator C24)
C24B "Cap SMD" SMD_0805 145.168,24.287 r90 bottom (schematic designator C24)
C24C "Cap SMD" SMD_0805 159.168,24.287 r90 bottom (schematic designator C24)
C24D "Cap SMD" SMD_0805 173.168,24.287 r90 bottom (schematic designator C24)
C25A "16V" SMD_0805 135.563,27.513 r270 bottom (schematic designator C25)
C25B "16V" SMD_0805 149.563,27.513 r270 bottom (schematic designator C25)
C25C "16V" SMD_0805 163.563,27.513 r270 bottom (schematic designator C25)
C25D "16V" SMD_0805 177.563,27.513 r270 bottom (schematic designator C25)
C26A "Cap SMD" SMD_0805 124.133,38.664 r270 bottom (schematic designator C26)
C26B "Cap SMD" SMD_0805 138.132,38.664 r270 bottom (schematic designator C26)
C26C "Cap SMD" SMD_0805 152.133,38.664 r270 bottom (schematic designator C26)
C26D "Cap SMD" SMD_0805 166.133,38.664 r270 bottom (schematic designator C26)
C27A "Cap SMD" SMD_0805 124.844,12.248 r270 bottom (schematic designator C27)
C27B "Cap SMD" SMD_0805 138.844,12.248 r270 bottom (schematic designator C27)
C27C "Cap SMD" SMD_0805 152.844,12.248 r270 bottom (schematic designator C27)
C27D "Cap SMD" SMD_0805 166.844,12.248 r270 bottom (schematic designator C27)
C28A "100V" SMD_0805 127.358,38.765 r270 bottom (schematic designator C28)
C28B "100V" SMD_0805 141.358,38.765 r270 bottom (schematic designator C28)
C28C "100V" SMD_0805 155.358,38.765 r270 bottom (schematic designator C28)
C28D "100V" SMD_0805 169.358,38.765 r270 bottom (schematic designator C28)
C29 "1u" SMD_0805 93.599,56.515 r90 bottom
C30 "1u" SMD_0805 93.599,51.003 r270 bottom
C31 "1u" SMD_0805 104.699,50.698 r270 bottom
C32 "Cap SMD" SMD_0805 78.334,73.431 r90 bottom
C33 "50V" SMD_CAP_6032 15.977,56.286 r180 bottom
C34 "50V" SMD_CAP_6032 5.08,56.159 r0 bottom
C37 "Cap SMD" SMD_0805 42.062,58.369 r180 bottom
C38 "Cap SMD" SMD_0805 47.346,69.952 r0 bottom
C39 "Cap SMD" SMD_0805 47.777,64.516 r0 bottom
C40 "Cap SMD" SMD_0805 48.387,73.482 r90 bottom
C41 "Cap SMD" SMD_0805 53.442,67.488 r0 bottom
C42 "Cap SMD" SMD_0805 45.06,60.249 r270 bottom
C43 "50V" SMD_CAP_6032 10.16,64.262 r180 top
C44 "Cap SMD" SMD_0805 39.827,66.421 r180 bottom
C46 "Cap SMD" SMD_0805 53.315,74.625 r0 bottom
C47 "Cap SMD" SMD_0805 50.216,73.482 r90 bottom
C48 "Cap SMD" SMD_0805 43.205,74.066 r90 bottom
C49 "Cap SMD" SMD_0805 41.275,74.066 r90 bottom
C50 "Cap SMD" SMD_0805 53.315,69.266 r0 bottom
C51 "Cap SMD" SMD_0805 32.766,66.269 r270 bottom
C52 "Cap SMD" SMD_0805 39.878,64.643 r180 bottom
C53 "Cap SMD" SMD_0805 39.954,69.317 r180 bottom
C54 "Cap SMD" SMD_0805 53.061,64.694 r0 bottom
C55 "Cap SMD" SMD_0805 52.019,60.35 r270 bottom
C56 "Cap SMD" SMD_0805 49.505,60.3 r270 bottom
Designator10 "Comment" "TARGET MECHANICAL 5" -17.831,-40.665 r0 top
Designator10 "Comment" "TARGET MECHANICAL 5" 200.406,99.847 r0 top
Designator10 "Comment" "TARGET MECHANICAL 5" -18.237,101.219 r0 top
J1 "PCB Edge Fingers" "PCB EDGE, MOLEX 46114" -0.54,30 r0 top locked
J2A "LEMO 4-pin size 0" "LEMO SIZE 0, 4-PIN PCB" 7,10.8 r180 top locked (schematic designator J2)
J2B "LEMO 4-pin size 0" "LEMO SIZE 0, 4-PIN PCB" 21,10.8 r180 top (schematic designator J2)
J2C "LEMO 4-pin size 0" "LEMO SIZE 0, 4-PIN PCB" 35,10.8 r180 top (schematic designator J2)
J2D "LEMO 4-pin size 0" "LEMO SIZE 0, 4-PIN PCB" 49,10.8 r180 top (schematic designator J2)
J2E "LEMO 4-pin size 0" "LEMO SIZE 0, 4-PIN PCB" 63,10.8 r180 top (schematic designator J2)
J2F "LEMO 4-pin size 0" "LEMO SIZE 0, 4-PIN PCB" 77,10.8 r180 top (schematic designator J2)
J2G "LEMO 4-pin size 0" "LEMO SIZE 0, 4-PIN PCB" 91,10.8 r180 top (schematic designator J2)
J2H "LEMO 4-pin size 0" "LEMO SIZE 0, 4-PIN PCB" 105,10.8 r180 top (schematic designator J2)
J3A "LEMO 2-pin size 0" "LEMO SIZE 0, 2-PIN PCB" 130,10.8 r180 top locked (schematic designator J3)
J3B "LEMO 2-pin size 0" "LEMO SIZE 0, 2-PIN PCB" 144,10.8 r180 top (schematic designator J3)
J3C "LEMO 2-pin size 0" "LEMO SIZE 0, 2-PIN PCB" 158,10.8 r180 top (schematic designator J3)
J3D "LEMO 2-pin size 0" "LEMO SIZE 0, 2-PIN PCB" 172,10.8 r180 top (schematic designator J3)
J4 "MICTOR 38 pin" "MICTOR 38 pin connector" 13.233,75.819 r180 top locked
L1A "513-1481-2-ND" "SMT Inductor 7 x 7mm" 129.2,41.14 r90 top (schematic designator L1)
L1B "513-1481-2-ND" "SMT Inductor 7 x 7mm" 143.2,41.14 r90 top (schematic designator L1)
L1C "513-1481-2-ND" "SMT Inductor 7 x 7mm" 157.2,41.14 r90 top (schematic designator L1)
L1D "513-1481-2-ND" "SMT Inductor 7 x 7mm" 171.2,41.14 r90 top (schematic designator L1)
L2A "513-1481-2-ND" "SMT Inductor 7 x 7mm" 127.8,21.74 r270 top (schematic designator L2)
L2B "513-1481-2-ND" "SMT Inductor 7 x 7mm" 141.8,21.74 r270 top (schematic designator L2)
L2C "513-1481-2-ND" "SMT Inductor 7 x 7mm" 155.8,21.74 r270 top (schematic designator L2)
L2D "513-1481-2-ND" "SMT Inductor 7 x 7mm" 169.8,21.74 r270 top (schematic designator L2)
P1 "Header 5X2" "HDR 2x5 RT, SAMTEC TSW" 76.327,74.676 r0 top
R1 "Res 0805" SMD_0805 98.806,67.691 r270 bottom
R2 "Res 0805" SMD_0805 155.931,66.624 r270 bottom
R3A "Res 0805" SMD_0805 2.642,20.828 r90 bottom (schematic designator R3)
R3B "Res 0805" SMD_0805 16.642,20.828 r90 bottom (schematic designator R3)
R3C "Res 0805" SMD_0805 30.642,20.828 r90 bottom (schematic designator R3)
R3D "Res 0805" SMD_0805 44.642,20.828 r90 bottom (schematic designator R3)
R3E "Res 0805" SMD_0805 58.642,20.828 r90 bottom (schematic designator R3)
R3F "Res 0805" SMD_0805 72.642,20.828 r90 bottom (schematic designator R3)
R3G "Res 0805" SMD_0805 86.642,20.828 r90 bottom (schematic designator R3)
R3H "Res 0805" SMD_0805 100.642,20.828 r90 bottom (schematic designator R3)
R4A "Res 0805" SMD_0805 5.791,17.374 r90 bottom (schematic designator R4)
R4B "Res 0805" SMD_0805 19.791,17.374 r90 bottom (schematic designator R4)
R4C "Res 0805" SMD_0805 33.791,17.374 r90 bottom (schematic designator R4)
R4D "Res 0805" SMD_0805 47.791,17.374 r90 bottom (schematic designator R4)
R4E "Res 0805" SMD_0805 61.791,17.374 r90 bottom (schematic designator R4)
R4F "Res 0805" SMD_0805 75.791,17.374 r90 bottom (schematic designator R4)
R4G "Res 0805" SMD_0805 89.791,17.374 r90 bottom (schematic designator R4)
R4H "Res 0805" SMD_0805 103.791,17.374 r90 bottom (schematic designator R4)
R5A "Res 0805" SMD_0805 7.569,17.374 r90 bottom (schematic designator R5)
R5B "Res 0805" SMD_0805 21.569,17.374 r90 bottom (schematic designator R5)
R5C "Res 0805" SMD_0805 35.569,17.374 r90 bottom (schematic designator R5)
R5D "Res 0805" SMD_0805 49.569,17.374 r90 bottom (schematic designator R5)
R5E "Res 0805" SMD_0805 63.569,17.374 r90 bottom (schematic designator R5)
R5F "Res 0805" SMD_0805 77.569,17.374 r90 bottom (schematic designator R5)
R5G "Res 0805" SMD_0805 91.569,17.374 r90 bottom (schematic designator R5)
R5H "Res 0805" SMD_0805 105.569,17.374 r90 bottom (schematic designator R5)
R6A "S102" "VISHAY S102 SERIES" 6.375,30.505 r0 top (schematic designator R6)
R6B "S102" "VISHAY S102 SERIES" 20.375,30.505 r0 top (schematic designator R6)
R6C "S102" "VISHAY S102 SERIES" 34.375,30.505 r0 top (schematic designator R6)
R6D "S102" "VISHAY S102 SERIES" 48.375,30.505 r0 top (schematic designator R6)
R6E "S102" "VISHAY S102 SERIES" 62.375,30.505 r0 top (schematic designator R6)
R6F "S102" "VISHAY S102 SERIES" 76.375,30.505 r0 top (schematic designator R6)
R6G "S102" "VISHAY S102 SERIES" 90.375,30.505 r0 top (schematic designator R6)
R6H "S102" "VISHAY S102 SERIES" 104.375,30.505 r0 top (schematic designator R6)
R7A "1W (2512)" 6332[2512] 134.4,21.64 r90 top (schematic designator R7)
R7B "1W (2512)" 6332[2512] 148.4,21.64 r90 top (schematic designator R7)
R7C "1W (2512)" 6332[2512] 162.4,21.64 r90 top (schematic designator R7)
R7D "1W (2512)" 6332[2512] 176.4,21.64 r90 top (schematic designator R7)
R8A "Res 0805" SMD_0805 124.031,28.986 r270 bottom (schematic designator R8)
R8B "Res 0805" SMD_0805 138.031,28.986 r270 bottom (schematic designator R8)
R8C "Res 0805" SMD_0805 152.031,28.986 r270 bottom (schematic designator R8)
R8D "Res 0805" SMD_0805 166.031,28.986 r270 bottom (schematic designator R8)
R9A "Res 0805" SMD_0805 123.955,33.254 r90 bottom (schematic designator R9)
R9B "Res 0805" SMD_0805 137.955,33.254 r90 bottom (schematic designator R9)
R9C "Res 0805" SMD_0805 151.955,33.254 r90 bottom (schematic designator R9)
R9D "Res 0805" SMD_0805 165.955,33.254 r90 bottom (schematic designator R9)
R10 "Res 0805" SMD_0805 42.901,64.821 r90 bottom
R11 "Res 0805" SMD_0805 38.71,73.889 r90 bottom
R12 "Res 0805" SMD_0805 31.775,56.921 r270 bottom
R13 "Res 0805" SMD_0805 20.269,42.596 r270 top
RN1 "RES ARRAY  x4 10K" "RES ARRAY 0603 x 4" 123.696,56.108 r270 bottom
RN2 "RES ARRAY  x4" "RES ARRAY 0603 x 4" 72.898,77.978 r180 bottom
TP1 "Test point" PAD_80D_052H 77.191,65.735 r90 top
TP2 "Test point" PAD_80D_052H 64.008,66.777 r90 top
TP3 "Test point" PAD_80D_052H 175.336,55.347 r90 top
TP4 "Test point" PAD_80D_052H 32.182,49.301 r90 top
TP5A "Test point" PAD_80D_052H 1.981,26.264 r90 top (schematic designator TP5)
TP5B "Test point" PAD_80D_052H 15.981,26.264 r90 top (schematic designator TP5)
TP5C "Test point" PAD_80D_052H 29.981,26.264 r90 top (schematic designator TP5)
TP5D "Test point" PAD_80D_052H 43.981,26.264 r90 top (schematic designator TP5)
TP5E "Test point" PAD_80D_052H 57.981,26.264 r90 top (schematic designator TP5)
TP5F "Test point" PAD_80D_052H 71.981,26.264 r90 top (schematic designator TP5)
TP5G "Test point" PAD_80D_052H 85.981,26.264 r90 top (schematic designator TP5)
TP5H "Test point" PAD_80D_052H 99.981,26.264 r90 top (schematic designator TP5)
TP6A "Test point" PAD_80D_052H 8.433,33.757 r90 top (schematic designator TP6)
TP6B "Test point" PAD_80D_052H 22.433,33.757 r90 top (schematic designator TP6)
TP6C "Test point" PAD_80D_052H 36.433,33.757 r90 top (schematic designator TP6)
TP6D "Test point" PAD_80D_052H 50.433,33.757 r90 top (schematic designator TP6)
TP6E "Test point" PAD_80D_052H 64.433,33.757 r90 top (schematic designator TP6)
TP6F "Test point" PAD_80D_052H 78.433,33.757 r90 top (schematic designator TP6)
TP6G "Test point" PAD_80D_052H 92.433,33.757 r90 top (schematic designator TP6)
TP6H "Test point" PAD_80D_052H 106.433,33.757 r90 top (schematic designator TP6)
TP7 "Test point" PAD_80D_052H 99.898,41.478 r0 top
TP8A "Test point" PAD_80D_052H 126.975,15.977 r90 top (schematic designator TP8)
TP8B "Test point" PAD_80D_052H 140.995,16.078 r90 top (schematic designator TP8)
TP8C "Test point" PAD_80D_052H 155.054,16.002 r90 top (schematic designator TP8)
TP8D "Test point" PAD_80D_052H 169.037,16.129 r90 top (schematic designator TP8)
TP9A "Test point" PAD_80D_052H 134.75,45.954 r90 top (schematic designator TP9)
TP9B "Test point" PAD_80D_052H 148.75,45.954 r90 top (schematic designator TP9)
TP9C "Test point" PAD_80D_052H 162.75,45.954 r90 top (schematic designator TP9)
TP9D "Test point" PAD_80D_052H 176.75,45.954 r90 top (schematic designator TP9)
TP10 "Test point" PAD_80D_052H 116.561,41.097 r90 top
TP11 "Test point" PAD_80D_052H 115.875,13.995 r90 top
U2 "6A Pos Switching Regulator" "TEXAS Inst Switching Regulator" 82.95,62 r0 top
U3 "6A Pos Switching Regulator" "TEXAS Inst Switching Regulator" 140.075,61.95 r0 top
U4 "TXB0104" TSSOP14 126.454,56.672 r270 top
U5 "DAC8568" TSSOP16 102.006,55.823 r270 top
U6A "ADS1247" TSSOP20 12.074,26.861 r180 top (schematic designator U6)
U6B "ADS1247" TSSOP20 26.074,26.861 r180 top (schematic designator U6)
U6C "ADS1247" TSSOP20 40.074,26.861 r180 top (schematic designator U6)
U6D "ADS1247" TSSOP20 54.074,26.861 r180 top (schematic designator U6)
U6E "ADS1247" TSSOP20 68.074,26.861 r180 top (schematic designator U6)
U6F "ADS1247" TSSOP20 82.074,26.861 r180 top (schematic designator U6)
U6G "ADS1247" TSSOP20 96.074,26.861 r180 top (schematic designator U6)
U6H "ADS1247" TSSOP20 110.074,26.861 r180 top (schematic designator U6)
U7A "MAX1968" "TSSOP28 Exposed Pad" 125.375,28.648 r0 top (schematic designator U7)
U7B "MAX1968" "TSSOP28 Exposed Pad" 139.375,28.648 r0 top (schematic designator U7)
U7C "MAX1968" "TSSOP28 Exposed Pad" 153.375,28.648 r0 top (schematic designator U7)
U7D "MAX1968" "TSSOP28 Exposed Pad" 167.375,28.648 r0 top (schematic designator U7)
U8 "4.096V +/-0.5ppm" SO-8_M 93.624,53.721 r0 top
U9 "Voltage Reg, Pos Fixed" "TO-220 w/Heatsink 7136DG" 9.906,47.995 r0 top
U13 "XC3S50AN-5TQ144C" TQ144_N 46.482,67.056 r0 top locked
U14 "ADG804YRMZ" ADI-RM-10_L 40.665,61.036 r180 bottom
U15 "ADP151AUJZ-1.2-R7" ADI-UJ-5_N 47.244,67.234 r90 bottom

## Footprints (in the part's own frame and the unit in brackets; to place one, negate y for a bottom-side part, rotate by r counter-clockwise, add the part's x,y. Pads: shape width x height; smd on the part's side, far side on the other; paste and mask are expansions set on the pad)
6332[2512] [mm] "Chip Resistor; Body 6.3 x 3.2 mm (LxW typ)"
  rect 1.8x3.2 smd: 1(-2.8,0) 2(2.8,0)
  silkscreen extent -1.6,-1.5 1.6,1.5
ADI-RM-10_L [mm] "SOP, 10-Leads, Body 3x3mm, Pitch 0.5mm, IPC High Density"
  oval 1.55x0.25 smd: 1(-2.025,1) 2(-2.025,0.5) 3(-2.025,0) 4(-2.025,-0.5) 5(-2.025,-1) 6(2.025,-1) 7(2.025,-0.5) 8(2.025,0) 9(2.025,0.5) 10(2.025,1)
  silkscreen extent -2.15,-1.55 0.85,1.8, body extent -1.55,-1.55 1.55,1.55, height 1.1
ADI-UJ-5_N [mm] "SOT23, 5-Leads, Body 2.9x1.6mm, Pitch 0.95mm, IPC Medium Density"
  rect 0.95x0.6 smd: 1(-1.225,0.95) 2(-1.225,0) 3(-1.225,-0.95) 4(1.225,-0.95) 5(1.225,0.95)
  silkscreen extent -1.35,-1.45 0.35,1.93, body extent -0.8,-1.45 0.8,1.45, height 1
"CAP, Thru Hole 10mm dia" [mm]
  rect 2x2 hole 1.2: 1(2.5,0)
  round 2 hole 1.2: 2(-2.5,0)
  silkscreen extent 6,-1 8,1
"HDR 2x5 RT, SAMTEC TSW" [mm] "SAMTEC TSW series dual row RT angle"
  rect 1.5x1.5 hole 0.9: 1(0,0)
  round 1.5 hole 0.9: 2(0,-2.54) 3(-2.54,0) 4(-2.54,-2.54) 5(-5.08,0) 6(-5.08,-2.54) 7(-7.62,0) 8(-7.62,-2.54) 9(-10.16,0) 10(-10.16,-2.54)
  silkscreen extent -11.43,1.52 1.27,9.91
"LEMO SIZE 0, 2-PIN PCB" [mm]
  rect 2x2 hole 1 paste-0.152 mask-0.089: 1(0,-2.54)
  round 2 hole 1 paste-0.152 mask-0.089: 2(0,0)
  silkscreen extent -4.5,2 4.5,20.32
"LEMO SIZE 0, 4-PIN PCB" [mm]
  rect 2x2 hole 1 paste-0.152 mask-0.089: 1(1.27,-2.54)
  round 2 hole 1 paste-0.152 mask-0.089: 2(1.27,0) 3(-1.27,0) 4(-1.27,-2.54)
  silkscreen extent -4.5,2 4.5,20.32
"MICTOR 38 pin connector" [mil] "Receptical"
  round 50 hole 32: 0(-200,0) 0(-100,0) 0(0,0) 0(100,0) 0(200,0)
  rrect60% 17x50 smd: 1(225,139) 2(225,-139) 3(200,139) 4(200,-139) 5(175,139) 6(175,-139) 7(150,139) 8(150,-139) 9(125,139) 10(125,-139) 11(100,139) 12(100,-139) 13(75,139) 14(75,-139) 15(50,139) 16(50,-139) 17(25,139) 18(25,-139) 19(0,139) 20(0,-139) 21(-25,139) 22(-25,-139) 23(-50,139) 24(-50,-139) 25(-75,139) 26(-75,-139) 27(-100,139) 28(-100,-139) 29(-125,139) 30(-125,-139) 31(-150,139) 32(-150,-139) 33(-175,139) 34(-175,-139) 35(-200,139) 36(-200,-139) 37(-225,139) 38(-225,-139)
  round 94 hole 94 unplated: A(450,0)
  silkscreen extent -500,-136 512,185
PAD_80D_052H [mil]
  round 80 hole 52: 1(0,0)
"PCB EDGE, MOLEX 46114" [mil] "Mates with Molex 46114-4241"
  rect 264x383 smd far side paste-6 mask-3.5: P1(-213,908) P2(-213,1380.5)
  rect 264x383 smd paste-6 mask-3.5: P3(-213,908) P4(-213,1380.5)
  rect 264x30 smd far side paste-6 mask-3.5: S1(-213,32.5) S2(-213,82.5) S3(-213,132.5) S4(-213,182.5) S5(-213,232.5) S6(-213,282.5) S7(-213,332.5) S8(-213,382.5) S9(-213,432.5) S10(-213,482.5) S11(-213,532.5) S12(-213,582.5)
  rect 264x30 smd paste-6 mask-3.5: S13(-213,32.5) S14(-213,82.5) S15(-213,132.5) S16(-213,182.5) S17(-213,232.5) S18(-213,282.5) S19(-213,332.5) S20(-213,382.5) S21(-213,432.5) S22(-213,482.5) S23(-213,532.5) S24(-213,582.5)
"RES ARRAY 0603 x 4" [mm]
  rect 0.44x1.15 smd: 1(0,0.1) 2(0,2.05) 3(0.8,0.1) 4(0.8,2.05) 5(1.6,0.1) 6(1.6,2.05) 7(2.4,0.1) 8(2.4,2.05)
  silkscreen extent -0.6,-0.6 3,1.8
SMD_0805 [mil]
  rect 50x50 smd: 1(-45,0) 2(45,0)
  silkscreen extent -1,-1 1,1
SMD_CAP_6032 [mil]
  rect 100x100 smd: NEG(-115,0) POS(115,0)
  silkscreen extent -179,-110 195,64
"SMT Inductor 7 x 7mm" [mil] "Coiltronics SD7030 series"
  rect 100x280 smd: 1(-90,0) 2(91,0)
  silkscreen extent -150,-150 150,150
SO-8_M [mm] "8-Pin Small Outline Integrated Circuit 1.27 mm Pitch, IPC Low Density"
  oval 2.5x0.7 smd: 1(-2.45,1.905) 2(-2.45,0.635) 3(-2.45,-0.635) 4(-2.45,-1.905) 5(2.45,-1.905) 6(2.45,-0.635) 7(2.45,0.635) 8(2.45,1.905)
  silkscreen extent -2.57,-2.5 0.8,2.93, body extent -2,-2.5 2,2.5, height 1.75
"TARGET MECHANICAL 5" [mm]
"TEXAS Inst Switching Regulator" [mil] "Texas Instruments Integrated switching regulator"
  rect 115x115 hole 78: 1(0,750)
  round 115 hole 78: 2(0,0) 3(500,0) 4(625,0) 5(750,0) 6(1375,0) 7(1375,750)
  silkscreen extent -80,-80 1455,830
"TO-220 w/Heatsink 7136DG" [mil]
  round 70 hole 40: 1(100,98.42) 2(0,98.42) 3(-100,98.42)
  silkscreen extent -197,0 197,157
TQ144_N [mm] "Thin QFP, 144-Leads, Body 20x20mm, Pitch 0.5mm, IPC Medium Density"
  oval 1.8x0.3 smd: 1(-10.55,8.75) 2(-10.55,8.25) 3(-10.55,7.75) 4(-10.55,7.25) 5(-10.55,6.75) 6(-10.55,6.25) 7(-10.55,5.75) 8(-10.55,5.25) 9(-10.55,4.75) 10(-10.55,4.25) 11(-10.55,3.75) 12(-10.55,3.25) 13(-10.55,2.75) 14(-10.55,2.25) 15(-10.55,1.75) 16(-10.55,1.25) 17(-10.55,0.75) 18(-10.55,0.25) 19(-10.55,-0.25) 20(-10.55,-0.75) 21(-10.55,-1.25) 22(-10.55,-1.75) 23(-10.55,-2.25) 24(-10.55,-2.75) 25(-10.55,-3.25) 26(-10.55,-3.75) 27(-10.55,-4.25) 28(-10.55,-4.75) 29(-10.55,-5.25) 30(-10.55,-5.75) 31(-10.55,-6.25) 32(-10.55,-6.75) 33(-10.55,-7.25) 34(-10.55,-7.75) 35(-10.55,-8.25) 36(-10.55,-8.75) 73(10.55,-8.75) 74(10.55,-8.25) 75(10.55,-7.75) 76(10.55,-7.25) 77(10.55,-6.75) 78(10.55,-6.25) 79(10.55,-5.75) 80(10.55,-5.25) 81(10.55,-4.75) 82(10.55,-4.25) 83(10.55,-3.75) 84(10.55,-3.25) 85(10.55,-2.75) 86(10.55,-2.25) 87(10.55,-1.75) 88(10.55,-1.25) 89(10.55,-0.75) 90(10.55,-0.25) 91(10.55,0.25) 92(10.55,0.75) 93(10.55,1.25) 94(10.55,1.75) 95(10.55,2.25) 96(10.55,2.75) 97(10.55,3.25) 98(10.55,3.75) 99(10.55,4.25) 100(10.55,4.75) 101(10.55,5.25) 102(10.55,5.75) 103(10.55,6.25) 104(10.55,6.75) 105(10.55,7.25) 106(10.55,7.75) 107(10.55,8.25) 108(10.55,8.75)
  oval 0.3x1.8 smd: 37(-8.75,-10.55) 38(-8.25,-10.55) 39(-7.75,-10.55) 40(-7.25,-10.55) 41(-6.75,-10.55) 42(-6.25,-10.55) 43(-5.75,-10.55) 44(-5.25,-10.55) 45(-4.75,-10.55) 46(-4.25,-10.55) 47(-3.75,-10.55) 48(-3.25,-10.55) 49(-2.75,-10.55) 50(-2.25,-10.55) 51(-1.75,-10.55) 52(-1.25,-10.55) 53(-0.75,-10.55) 54(-0.25,-10.55) 55(0.25,-10.55) 56(0.75,-10.55) 57(1.25,-10.55) 58(1.75,-10.55) 59(2.25,-10.55) 60(2.75,-10.55) 61(3.25,-10.55) 62(3.75,-10.55) 63(4.25,-10.55) 64(4.75,-10.55) 65(5.25,-10.55) 66(5.75,-10.55) 67(6.25,-10.55) 68(6.75,-10.55) 69(7.25,-10.55) 70(7.75,-10.55) 71(8.25,-10.55) 72(8.75,-10.55) 109(8.75,10.55) 110(8.25,10.55) 111(7.75,10.55) 112(7.25,10.55) 113(6.75,10.55) 114(6.25,10.55) 115(5.75,10.55) 116(5.25,10.55) 117(4.75,10.55) 118(4.25,10.55) 119(3.75,10.55) 120(3.25,10.55) 121(2.75,10.55) 122(2.25,10.55) 123(1.75,10.55) 124(1.25,10.55) 125(0.75,10.55) 126(0.25,10.55) 127(-0.25,10.55) 128(-0.75,10.55) 129(-1.25,10.55) 130(-1.75,10.55) 131(-2.25,10.55) 132(-2.75,10.55) 133(-3.25,10.55) 134(-3.75,10.55) 135(-4.25,10.55) 136(-4.75,10.55) 137(-5.25,10.55) 138(-5.75,10.55) 139(-6.25,10.55) 140(-6.75,10.55) 141(-7.25,10.55) 142(-7.75,10.55) 143(-8.25,10.55) 144(-8.75,10.55)
  silkscreen extent -10.67,-9.25 9.25,9.57, body extent -10,-10 10,10, height 1.6
TSSOP14 [mm] "Shrink Small Outline; 14 Leads; Body Width 4.4 mm; Pitch 0.65 mm"
  rect 0.3x1.65 smd: 1(0,0) 2(0.65,0) 3(1.3,0) 4(1.95,0) 5(2.6,0) 6(3.25,0) 7(3.9,0) 8(3.9,5.55) 9(3.25,5.55) 10(2.6,5.55) 11(1.95,5.55) 12(1.3,5.55) 13(0.65,5.55) 14(0,5.55)
  silkscreen extent -0.82,-0.12 4.55,4.33
TSSOP16 [mm] "Shrink Small Outline; 16 Leads; Body Width 4.4 mm; Pitch 0.65 mm"
  rect 0.3x1.65 smd: 1(0,0) 2(0.65,0) 3(1.3,0) 4(1.95,0) 5(2.6,0) 6(3.25,0) 7(3.9,0) 8(4.5,0) 9(4.55,5.55) 10(3.9,5.55) 11(3.25,5.55) 12(2.6,5.55) 13(1.9,5.55) 14(1.3,5.55) 15(0.65,5.55) 16(0,5.55)
  silkscreen extent -0.82,-0.12 5.2,4.32
TSSOP20 [mm] "Shrink Small Outline; 20 Leads; Body Width 4.4 mm; Pitch 0.65 mm"
  rect 0.3x1.65 smd: 1(0,0) 2(0.65,0) 3(1.3,0) 4(1.95,0) 5(2.6,0) 6(3.25,0) 7(3.9,0) 8(4.5,0) 9(5.2,0) 10(5.85,0) 11(5.85,5.55) 12(5.2,5.55) 13(4.5,5.55) 14(3.9,5.55) 15(3.25,5.55) 16(2.6,5.55) 17(1.95,5.55) 18(1.3,5.55) 19(0.65,5.55) 20(0,5.55)
  silkscreen extent -0.83,-0.12 6.5,4.33
"TSSOP28 Exposed Pad" [mm] "Shrink Small Outline; 28 Leads; Body Width 4.4 mm; Pitch 0.65 mm"
  rect 0.3x1.65 smd: 1(0,0) 2(0.65,0) 3(1.3,0) 4(1.95,0) 5(2.6,0) 6(3.25,0) 7(3.9,0) 8(4.5,0) 9(5.2,0) 10(5.85,0) 11(6.5,0) 12(7.15,0) 13(7.8,0) 14(8.45,0) 15(8.45,5.7) 16(7.8,5.7) 17(7.15,5.7) 18(6.5,5.7) 19(5.85,5.7) 20(5.2,5.7) 21(4.5,5.7) 22(3.85,5.7) 23(3.15,5.7) 24(2.55,5.7) 25(1.95,5.7) 26(1.3,5.7) 27(0.65,5.7) 28(0,5.7)
  round 0.61 hole 0.356: 29(2.275,2.258) 29(2.275,3.292) 29(3.25,2.258) 29(3.25,3.292) 29(4.225,2.258) 29(4.225,3.292) 29(5.2,2.258) 29(5.2,3.292) 29(6.175,2.258) 29(6.175,3.292)
  rect 5.5x3.05 smd: 29(4.225,2.85)
  silkscreen extent -0.82,-0.12 9.14,4.57
"VISHAY S102 SERIES" [mil] "Matched pair"
  rect 60x60 hole 30: 1(-100,0)
  round 60 hole 30: 2(100,0)
  silkscreen extent -150,-50 150,50

## Part data
C1 C2 C3 C4 C6 C7 C8 C9 C14A C14B C14C C14D C14E C14F C14G C14H C15A C15B C15C C15D C15E C15F C15G C15H C16A C16B C16C C16D C16E C16F C16G C16H C20A C20B C20C C20D C20E C20F C20G C20H C25A C25B C25C C25D C28A C28B C28C C28D: library part "Cap SMD", "Capacitor"
C5 C10: library part "Cap Elec, 330 uF, 35V", "Radial Thru hole"
C11 C12 C17A C17B C17C C17D C17E C17F C17G C17H C18A C18B C18C C18D C18E C18F C18G C18H C19A C19B C19C C19D C19E C19F C19G C19H C21A C21B C21C C21D C22A C22B C22C C22D C23A C23B C23C C23D C24A C24B C24C C24D C26A C26B C26C C26D C27A C27B C27C C27D C32 C37 C38 C39 C40 C41 C42 C44 C46 C47 C48 C49 C50 C51 C52 C53 C54 C55 C56: "Capacitor"
C13 C29 C30 C31: library part Cap, "Capacitor"
C33 C34 C43: library part "Cap Tant 35V", "outline 6.0mm x 3.2mm"
J1: library part "Conn, PCB Card Edge / Molex 46114, 24 sig / 4 pwr", "PCB Edge Conn to fit Molex 46114 backplane connector"
J2A J2B J2C J2D J2E J2F J2G J2H: library part "LEMO Size 0, 4 pin, PCB"
J3A J3B J3C J3D: library part "LEMO Size 0, 2 pin, PCB"
J4: library part "MICTOR Adapter", "38 pin MICTOR Adapter"
L1A L1B L1C L1D L2A L2B L2C L2D: library part "Inductor SMD 7 x 7mm", "Inductor"
P1: "Header, 5-Pin, Dual row"
R1 R2 R3A R3B R3C R3D R3E R3F R3G R3H R4A R4B R4C R4D R4E R4F R4G R4H R5A R5B R5C R5D R5E R5F R5G R5H R8A R8B R8C R8D R9A R9B R9C R9D R10 R11 R12 R13: library part "Res SMD", "Resistor 0805"
R6A R6B R6C R6D R6E R6F R6G R6H: library part "RES TH Radial", "Vishay Foil Resistor"
R7A R7B R7C R7D: library part "Res SMD"
RN1 RN2: "Resistor Array 4 Isolated"
TP1 TP2 TP3 TP4 TP5A TP5B TP5C TP5D TP5E TP5F TP5G TP5H TP6A TP6B TP6C TP6D TP6E TP6F TP6G TP6H TP7 TP8A TP8B TP8C TP8D TP9A TP9B TP9C TP9D TP10 TP11: "Test Point"
U2 U3: library part PTN78020W, "Pos Adj Switching Regulator"
U4: "4-Chan Logic Level Shifter Bi-directional"
U5: "8 Chan, 16-bit DAC, SPI Interface"
U6A U6B U6C U6D U6E U6F U6G U6H: "24bit ADC for Temp Sensors"
U7A U7B U7C U7D: "TEC Driver +/- 3A"
U8: library part MAX6341, "VREF 4.096V 0.5ppm"
U9: "7805A"
U13: "Spartan-3AN Non-Volatile FPGA, 108 User I/Os, 144-Pin TQFP, High Performance, Commercial Grade"
U14: library part CMP-0798-00106-1, "1.65 to 3.6 V, CMOS, 0.5 Ohm, 4-Channel Multiplexer, -40 to 125 degC, 10-pin SOP (RM-10), Tube"
U15: library part CMP-0786-00393-1, "Ultralow Noise, 200 mA, CMOS Linear Regulator, 2.2 to 5.5 V Vin, 1.2 V Vout, Industrial, 5-pin SOT23 (UJ-5), Reel"

## Via types
v1: diameter 0.508, hole 0.254, Top Layer (*.GTL) to Bottom Layer (*.GBL), tented both sides, 324 vias
v2: diameter 0.61, hole 0.254, Top Layer (*.GTL) to Bottom Layer (*.GBL), tented both sides, 234 vias
v3: diameter 1.27, hole 0.711, Top Layer (*.GTL) to Bottom Layer (*.GBL), 17 vias

## Nets (pads, with @x,y where several pads share a name; then routed paths per layer and width w, separated by ;. In a path a pad name is that pad's centre, name@x,y a point inside that pad or via, vN(x,y) a via of type N, cw(c..) or ccw(c..) an arc to the next point about the centre after c; other vN are vias at no path point)
1.2V: C39.2 C40.2 C41.2 C42.2 C44.2 U13.22 U13.52 U13.94 U13.122 U15.5 | length 55
  Top Layer (*.GTL) w0.254: U13.22@35.98,65.354 37.592,65.354 v1(37.744,65.507) ; v1(45.11,57.912) 45.232,57.79 U13.52@45.232,56.506 ; v1(48.489,75.794) 48.732,76.037 U13.122@48.732,77.606 ; v1(55.499,68.377) 55.905,68.783 57.009,68.783 U13.94@57.032,68.806
  MidLayer1 (*.G1) w0.254: v1(47.701,63.271) 47.701,75.006 v1(48.489,75.794)
  MidLayer2 (*.G2) w0.254: v1(37.744,65.507) 43.79,65.507 46.05,63.246 47.676,63.246 v1(47.701,63.271)
  Bottom Layer (*.GBL) w0.254: v1(37.744,65.507) 37.77,65.507 C44.2@38.684,66.421 ; v1(45.11,57.912) 45.06,57.963 C42.2@45.06,59.106 46.304,59.106 47.727,60.528 v1@47.727,63.271 ; v1@47.727,63.322 C39.2@48.92,64.516 C39.2@48.92,64.77 ; U15.5@48.194,68.459 48.762,68.459 49.251,67.97 49.251,67.285 48.92,66.954 C39.2@48.92,64.77 ; C40.2@48.387,74.625 48.489,74.727 v1(48.489,75.794) ; v1(55.499,68.377) 54.61,67.488 C41.2@54.585,67.488 53.34,66.243 50.394,66.243 C39.2@48.92,64.77
4.096VREF: C31.1 U5.8 U8.6 | length 14.6
  Top Layer (*.GTL) w0.254: U8.6@96.074,53.086 v1(98.044,53.086) ; v1(98.019,51.333) 98.029,51.323 U5.8@102.006,51.323
  MidLayer1 (*.G1) w0.254: v1(98.019,51.333) 98.019,53.061 v1(98.044,53.086)
  Bottom Layer (*.GBL) w0.254: v1(98.019,51.333) 104.191,51.333 C31.1@104.699,51.841